# Altium PCB triboard-tc3x7-extension-V01.PcbDoc (part 1 of 2)
Units mm, origin at the board's own origin, x right, y up, seen from the top; angles counter-clockwise.
Board outline 170 x 190 mm, 4 copper layers (Top Layer, Mid Layer 1, Mid Layer 2, Bottom Layer), stack 1.586 mm thick; 25 components, 194 nets, 552 pads, 468 vias.
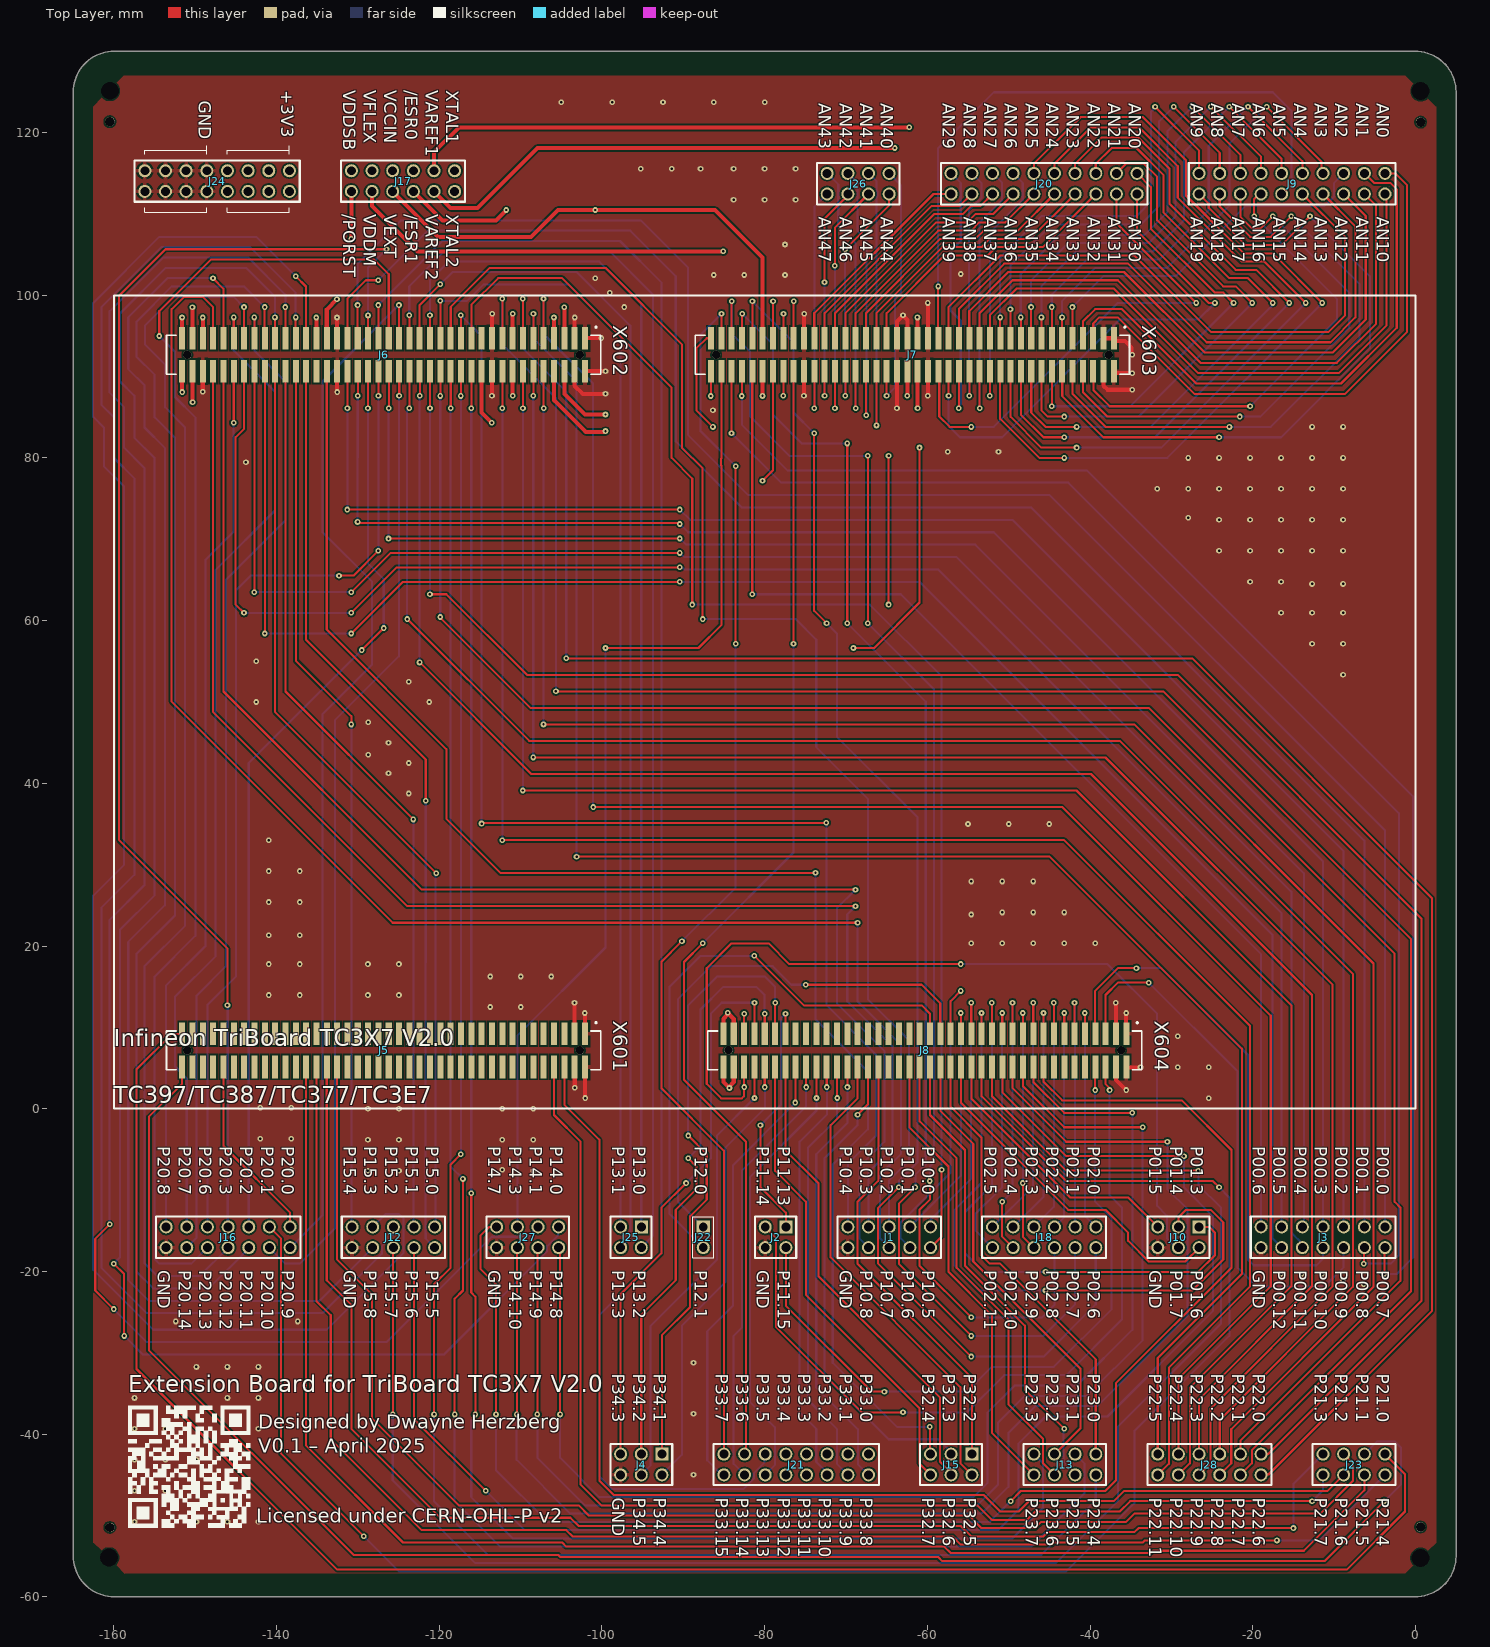
[diagram p0: Top Layer view]
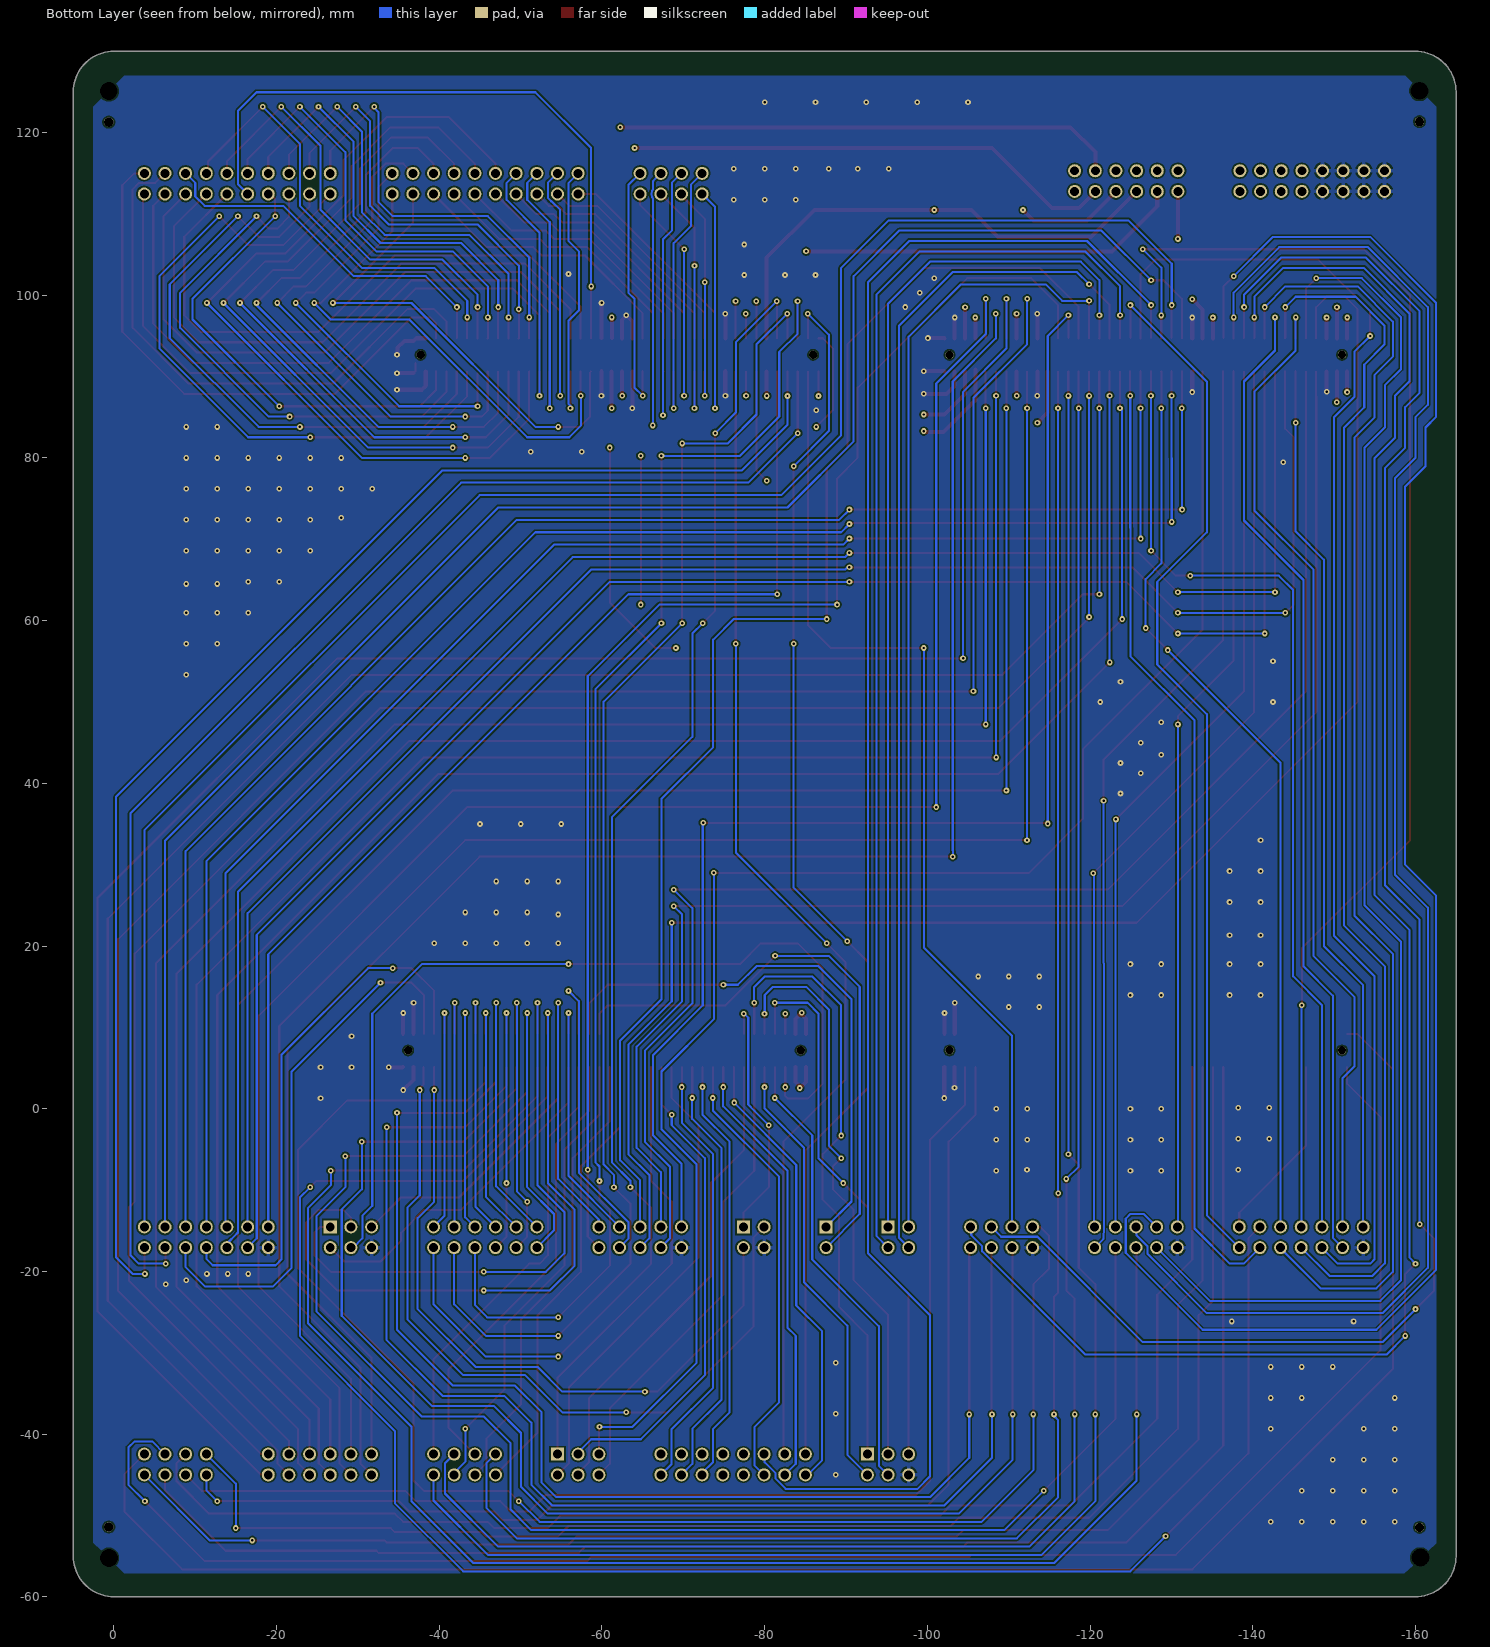
[diagram p1: Bottom Layer view, seen from below]
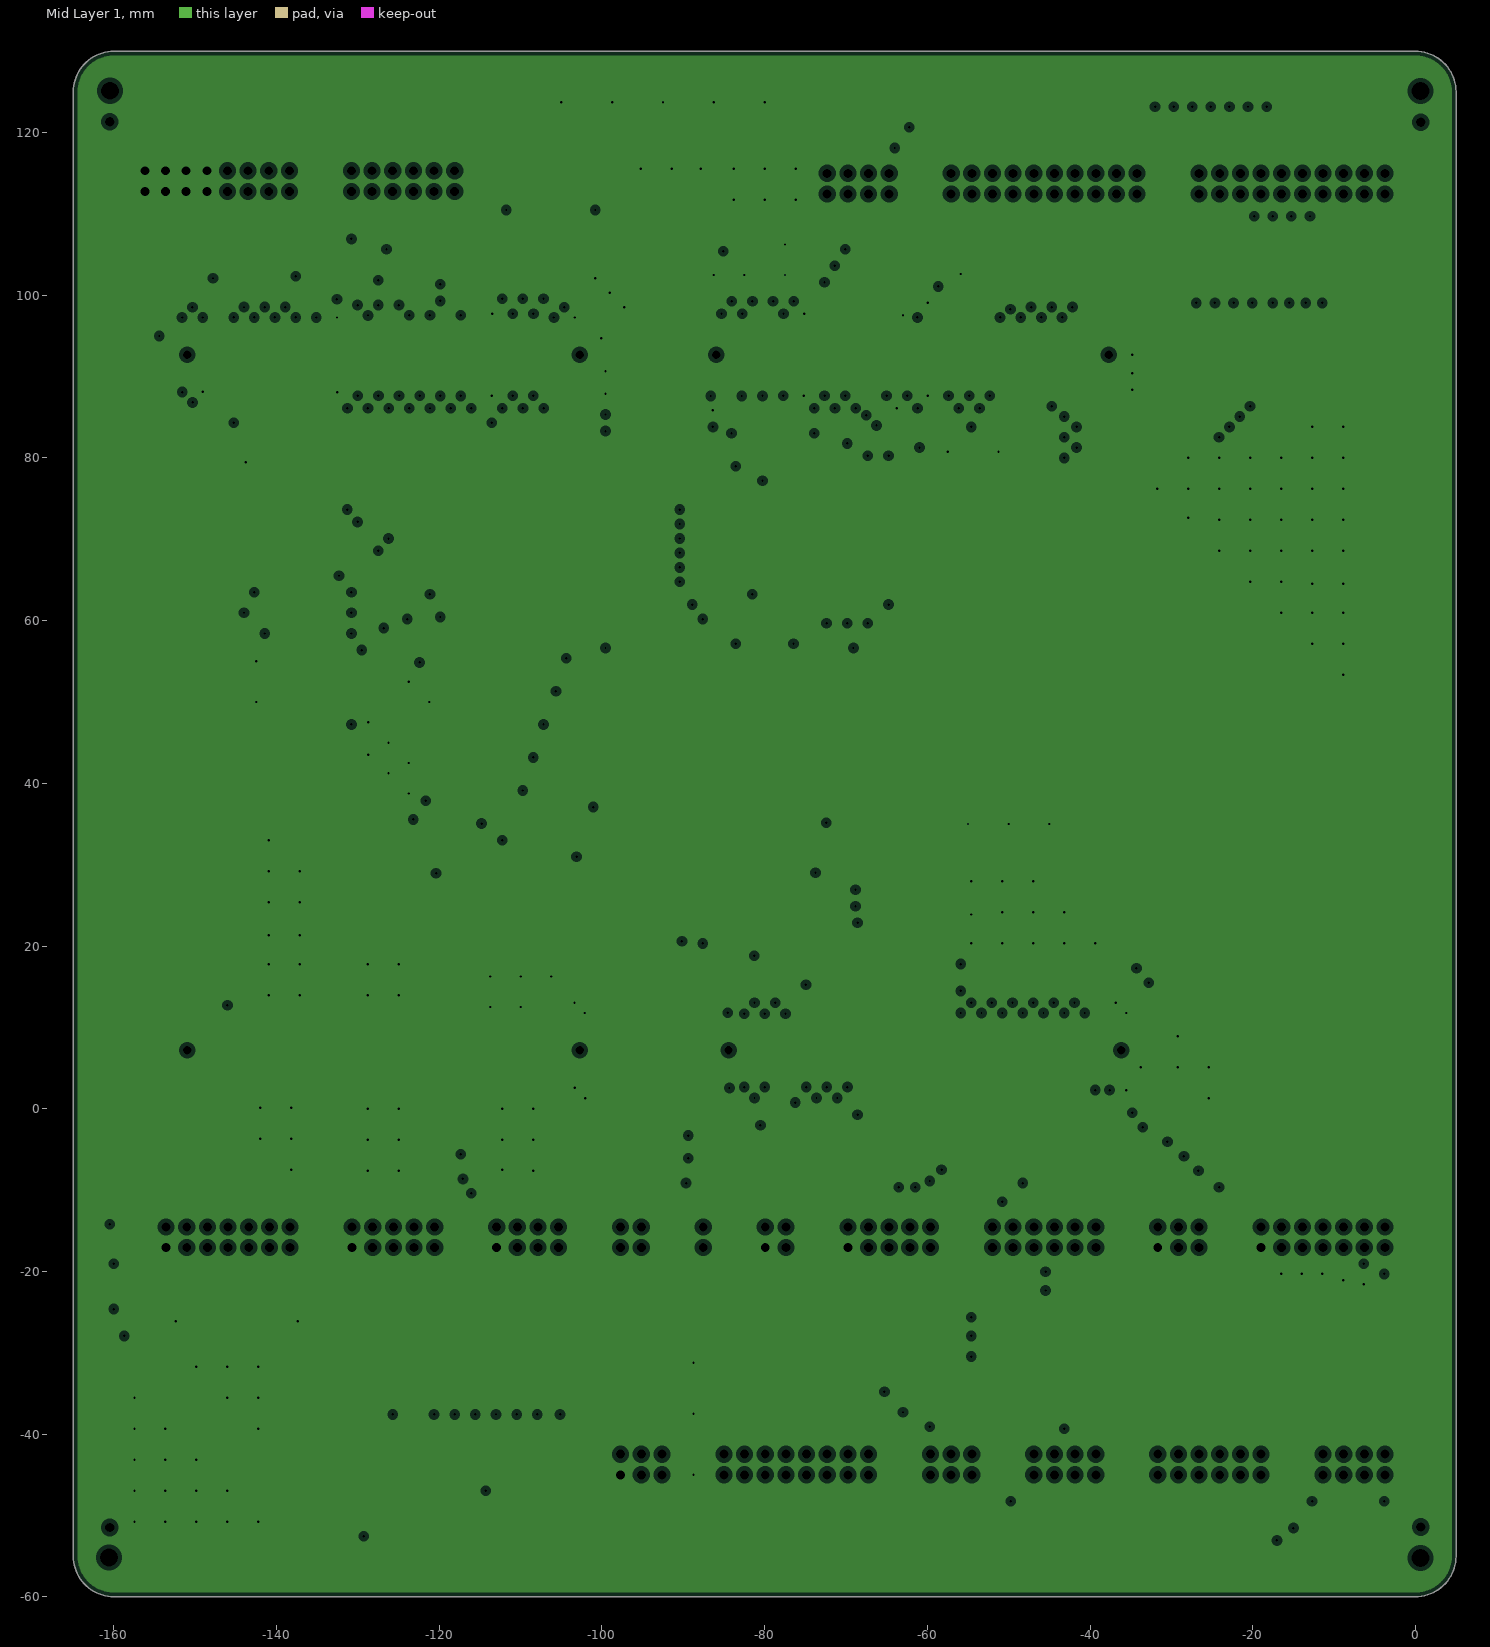
[diagram p2: Mid Layer 1, clearances drawn from the general rule]
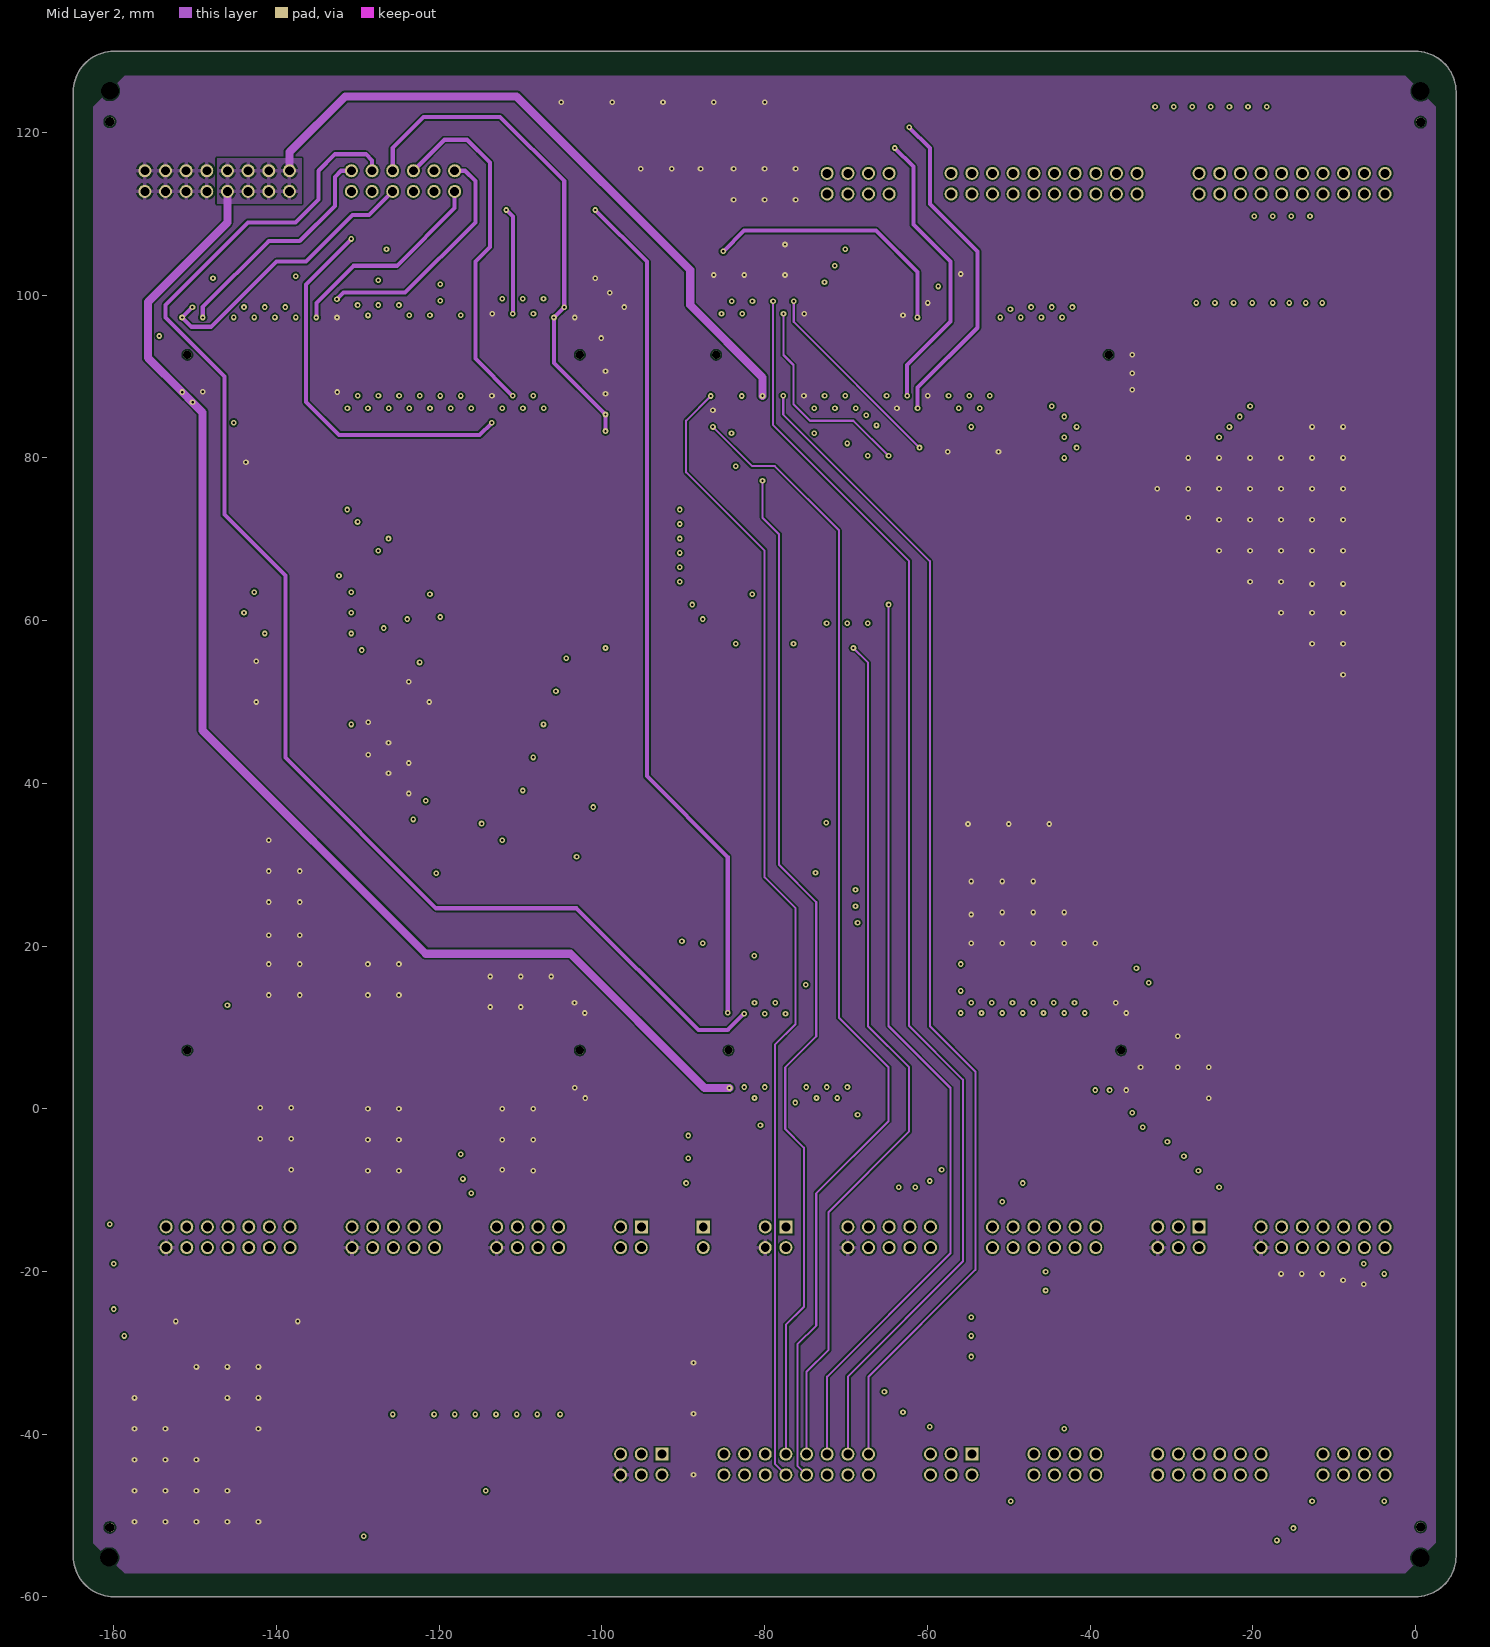
[diagram p3: Mid Layer 2]
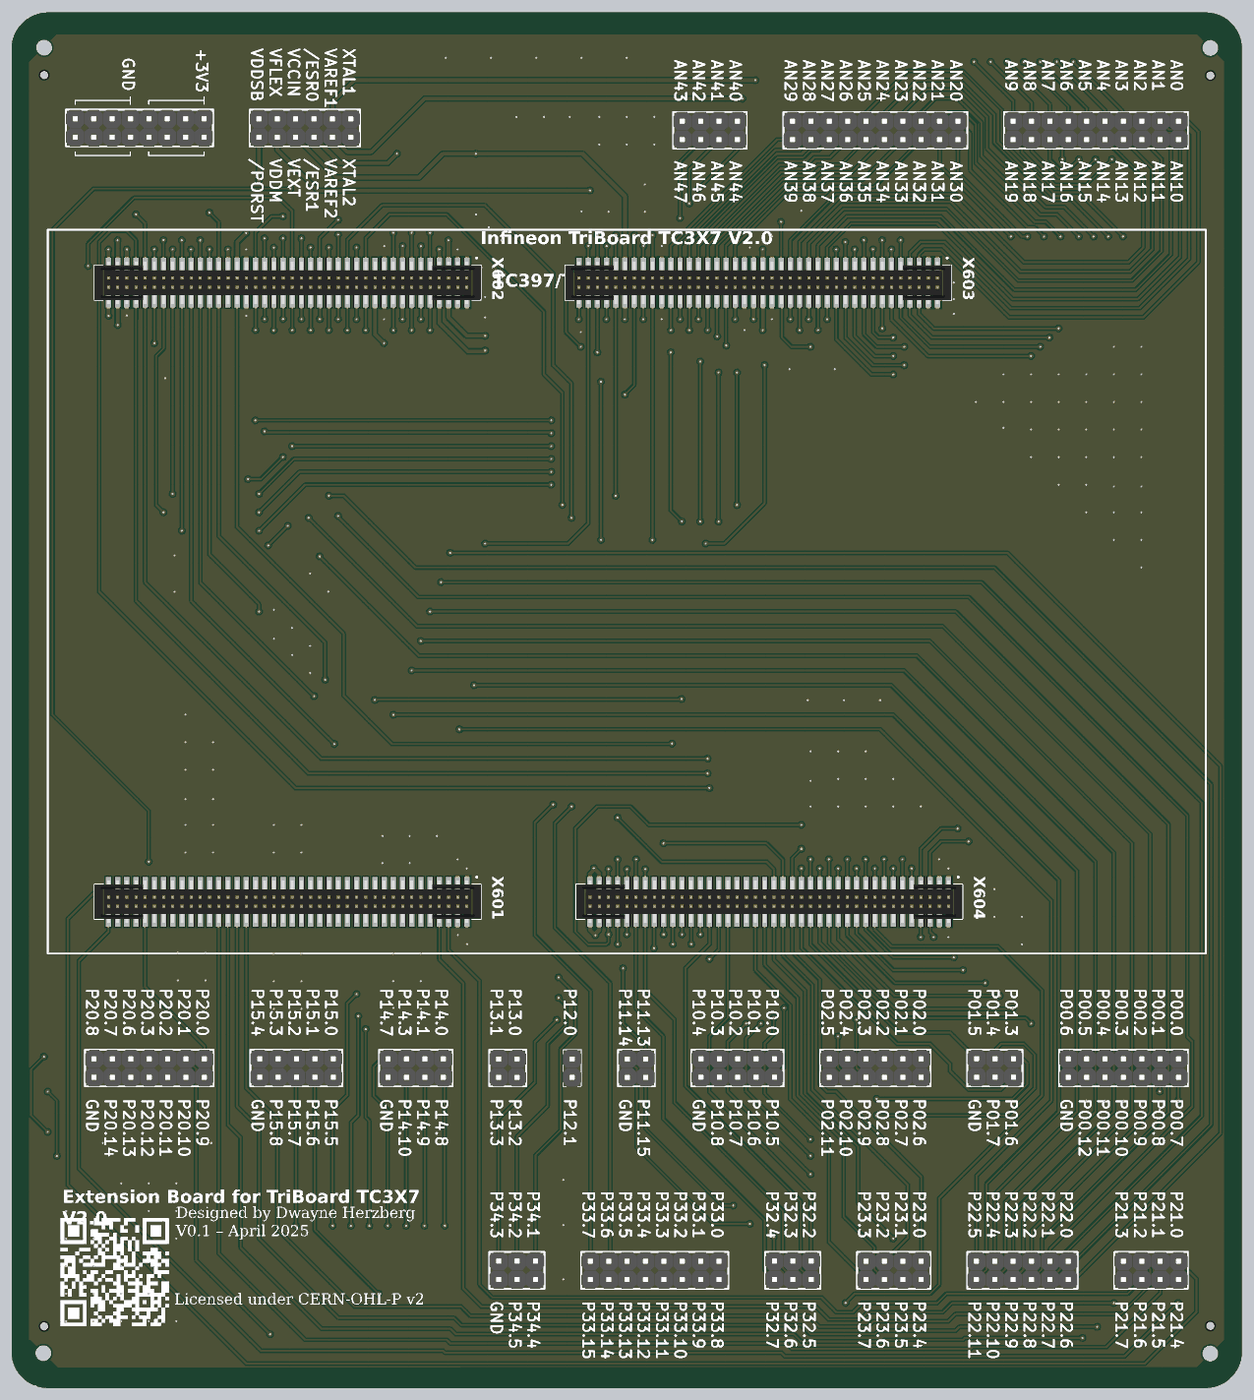
[diagram p5: 3D render of the assembled board from above, using the file's embedded part models]

## Layer stack, top to bottom
Top Solder: solder mask 0.0127, Solder Resist, Dk 3.8
Top Layer: signal copper 0.035
Dielectric 1: prepreg 0.2104, 7628, Dk 4.4
Mid Layer 1: plane copper 0.0152, net GND
Core: core 1.065, FR-4, Dk 4.6
Mid Layer 2: signal copper 0.0152
Dielectric 2: prepreg 0.2104, 7628, Dk 4.4
Bottom Layer: signal copper 0.035
Bottom Solder: solder mask 0.0127, Solder Resist, Dk 3.8

## Board outline
-165,-55 -165,125 cw(c-160,125) -160,130 0,130 cw(c0,125) 5,125 5,-55 cw(c0,-55) 0,-60 -160,-60 cw(c-160,-55)

## Design rules (kind name [scope] priority, off if disabled: settings)
BoardOutlineClearance [All] p1: gap=0.3 ignorepadtopadclearanceinfootprint=FALSE except(0.4: Arc-SplitBarrior Arc-SplitContinuation Track-SplitBarrior Track-SplitContinuation SMDPad-SplitBarrior SMDPad-SplitContinuation THPad-SplitBarrior THPad-SplitContinuation Via-SplitBarrior Via-SplitContinuation Fill-SplitBarrior Fill-SplitContinuation Poly-SplitBarrior Poly-SplitContinuation Region-SplitBarrior Region-SplitContinuation Text-SplitBarrior Text-SplitContinuation)
Clearance "Clearance Different Nets" [All] p1: gap=0.2 ignorepadtopadclearanceinfootprint=FALSE except(0.127: SMDPad-SMDPad SMDPad-Via THPad-Via Via-Via; 0.254: Arc-Via Arc-Text Track-Via Track-Text SMDPad-Text THPad-Text Via-Text Fill-Text Poly-Text Region-Text Text-Text; 0.5: THPad-THPad Via-Hole)
Clearance "Clearance Same Nets" [All] p2: gap=0.2 ignorepadtopadclearanceinfootprint=FALSE except(0.089: Arc-Arc Arc-Track Arc-SMDPad Track-Track Track-SMDPad SMDPad-SMDPad; 0.127: SMDPad-Via THPad-Via; 0.254: Arc-Via Arc-Text Track-Via Track-Text SMDPad-Text THPad-Text Via-Via Via-Text Fill-Text Poly-Text Region-Text Text-Text)
Clearance "Clearance Bottom Layer" [OnLayer('Bottom Layer')] p3: gap=0.203 ignorepadtopadclearanceinfootprint=TRUE except(0.254: Arc-Text Track-Text SMDPad-Text THPad-Text Via-Text Fill-Text Poly-Text Region-Text Text-Text)
Clearance "Clearance Top Layer" [OnLayer('Top Layer')] p4: gap=0.203 ignorepadtopadclearanceinfootprint=TRUE except(0.254: Arc-Text Track-Text SMDPad-Text THPad-Text Via-Text Fill-Text Poly-Text Region-Text Text-Text)
HoleSize [All] p1: absolutevalues=TRUE maxlimit=6.3 minlimit=0.2 maxpercent=80.000 minpercent=20.000
MinimumAnnularRing [All] p1: minimumring=0.13
MinimumSolderMaskSliver [All] p1: minsoldermaskwidth=0.1
PlaneClearance [All] p1: clearance=0.508
PlaneConnect [All] p1: planeconnectstyle=Relief reliefexpansion=0.508 reliefentries=4 reliefconductorwidth=0.254 reliefairgap=0.254
PolygonConnect PolygonConnect_1 [All] p1: thpad.connectstyle=Relief thpad.reliefconductorwidth=0.508 thpad.reliefentries=4 thpad.polygonreliefangle="90 Angle" thpad.airgapwidth=0.254 smdpad.connectstyle=Relief smdpad.reliefconductorwidth=0.508 smdpad.reliefentries=4 smdpad.polygonreliefangle="90 Angle" smdpad.airgapwidth=0.254 via.connectstyle=Direct via.reliefconductorwidth=0.508 via.reliefentries=4 via.polygonreliefangle="90 Angle" via.airgapwidth=0.254
RoutingCorners [All] p1: cornerstyle=Round minsetback=2.54 maxsetback=2.54
RoutingVias [All] p1: holewidth=0.3 width=0.7 viastyle="Through Hole" minholewidth=0.25 minwidth=0.55 maxholewidth=0.4 maxwidth=0.9
SilkToSilkClearance [All] p1: silktosilkclearance=0.1
SilkToSolderMaskClearance [IsPad] p1: minsilkscreentomaskgap=0.1 clearancetoexposedcopper=TRUE
SolderMaskExpansion SolderMask_VIA [IsVia] p1: expansion=0.102 istentingtop=TRUE
SolderMaskExpansion [All] p2: expansion=0.102 istentingtop=FALSE
UnRoutedNet [All] p1: checkbadconnections=TRUE
Width [All] p1: maxlimit=2.54 minlimit=0.089 preferedwidth=0.381
22 further rules are at their usual default settings.

## Components (designator, comment, footprint, x,y, rotation, side; value= is the part's Value field where it differs from the comment)
J1 "Header_5x2" HEADER_5X2 -59.61,-17.079 r180 top locked
J2 "Header_2x2" HEADER_2X2 -77.39,-17.079 r180 top locked
J3 "Header_7x2" HEADER_7X2 -3.73,-17.079 r180 top locked
J4 "Header_3x2" Header_3x2 -92.63,-45.019 r180 top locked
J5 "FTSH-140-02-L-DV-ES-A" SAMTEC_FTSH-140-XX-XXX-DV-ES-A -126.853,7.166 r180 top locked
J6 "FTSH-140-02-L-DV-ES-A" SAMTEC_FTSH-140-XX-XXX-DV-ES-A -126.853,92.688 r180 top locked
J7 "FTSH-140-02-L-DV-ES-A" SAMTEC_FTSH-140-XX-XXX-DV-ES-A -61.829,92.688 r180 top locked
J8 "FTSH-140-02-L-DV-ES-A" SAMTEC_FTSH-140-XX-XXX-DV-ES-A -60.305,7.166 r180 top locked
J9 "Header_10x2" HEADER_10X2 -3.73,112.461 r180 top locked
J10 "Header_3x2" HEADER_3X2 -26.59,-17.079 r180 top locked
J12 "Header_5x2" HEADER_5X2 -120.57,-17.079 r180 top locked
J13 "Header_4x2" HEADER_4X2 -39.29,-45.019 r180 top locked
J15 "Header_3x2" HEADER_3X2 -54.53,-45.019 r180 top locked
J16 "Header_7x2" HEADER_7X2 -138.35,-17.079 r180 top locked
J17 "Header_6x2" HEADER_6X2 -118.11,112.776 r180 top locked
J18 "Header_6x2" HEADER_6X2 -39.29,-17.079 r180 top locked
J20 "Header_10x2" HEADER_10X2 -34.21,112.461 r180 top locked
J21 "Header_8x2" HEADER_8X2 -67.23,-45.019 r180 top locked
J22 "Header_2" HEADER_2 -87.55,-14.539 r270 top locked
J23 "Header_4x2" HEADER_4X2 -3.73,-45.019 r180 top locked
J24 "Header_8x2" HEADER_8X2 -156.21,115.316 r0 top locked
J25 "Header_2x2" HEADER_2X2 -95.17,-17.079 r180 top locked
J26 "Header_4x2" HEADER_4X2 -64.69,112.461 r180 top locked
J27 "Header_4x2" HEADER_4X2 -105.33,-17.079 r180 top locked
J28 "Header_6x2" HEADER_6X2 -18.97,-45.019 r180 top locked

## Footprints (in the part's own frame and the unit in brackets; to place one, negate y for a bottom-side part, rotate by r counter-clockwise, add the part's x,y. Pads: shape width x height; smd on the part's side, far side on the other; paste and mask are expansions set on the pad)
HEADER_2 [mm]
  rect 1.6x1.6 hole 1.1: 1(0,0)
  round 1.6 hole 1.1: 2(2.54,0)
  silkscreen extent -1.27,-1.27 3.81,1.27, body extent -1.25,-1.29 3.83,1.25, height 13.04
HEADER_2X2 [mm]
  rect 1.6x1.6 hole 1.1: 1(0,-2.54)
  round 1.6 hole 1.1: 2(0,0) 3(2.54,-2.54) 4(2.54,0)
  silkscreen extent -1.27,-3.81 3.81,1.27, body extent -1.27,-3.81 3.81,1.27, height 13.04
Header_3x2 [mm]
  rect 1.6x1.6 hole 1.1: 1(0,-2.54)
  round 1.6 hole 1.1: 2(0,0) 3(2.54,-2.54) 4(2.54,0) 5(5.08,-2.54) 6(5.08,0)
  silkscreen extent -1.27,-3.81 6.35,1.27, body extent -1.27,-3.81 6.35,1.27, height 13.04
HEADER_3X2 [mm]
  rect 1.6x1.6 hole 1.1: 1(0,-2.54)
  round 1.6 hole 1.1: 2(0,0) 3(2.54,-2.54) 4(2.54,0) 5(5.08,-2.54) 6(5.08,0)
  silkscreen extent -1.27,-3.81 6.35,1.27, body extent -1.27,-3.81 6.35,1.27, height 13.04
HEADER_4X2 [mm]
  round 1.6 hole 1.1: 1(0,-2.54) 2(0,0) 3(2.54,-2.54) 4(2.54,0) 5(5.08,-2.54) 6(5.08,0) 7(7.62,-2.54) 8(7.62,0)
  silkscreen extent -1.27,-3.81 8.89,1.27, body extent -1.27,-3.81 8.89,1.27, height 13.04
HEADER_5X2 [mm]
  round 1.6 hole 1.1: 1(0,-2.54) 2(0,0) 3(2.54,-2.54) 4(2.54,0) 5(5.08,-2.54) 6(5.08,0) 7(7.62,-2.54) 8(7.62,0) 9(10.16,-2.54) 10(10.16,0)
  silkscreen extent -1.27,-3.81 11.43,1.27, body extent -1.27,-3.81 11.43,1.27, height 13.04
HEADER_6X2 [mm]
  round 1.6 hole 1.1: 1(0,-2.54) 2(0,0) 3(2.54,-2.54) 4(2.54,0) 5(5.08,-2.54) 6(5.08,0) 7(7.62,-2.54) 8(7.62,0) 9(10.16,-2.54) 10(10.16,0) 11(12.7,-2.54) 12(12.7,0)
  silkscreen extent -1.27,-3.81 13.97,1.27, body extent -1.27,-3.81 13.97,1.27, height 13.04
HEADER_7X2 [mm]
  round 1.6 hole 1.1: 1(0,-2.54) 2(0,0) 3(2.54,-2.54) 4(2.54,0) 5(5.08,-2.54) 6(5.08,0) 7(7.62,-2.54) 8(7.62,0) 9(10.16,-2.54) 10(10.16,0) 11(12.7,-2.54) 12(12.7,0) 13(15.24,-2.54) 14(15.24,0)
  silkscreen extent -1.27,-3.81 16.51,1.27, body extent -1.27,-3.81 16.51,1.27, height 13.04
HEADER_8X2 [mm]
  round 1.6 hole 1.1: 1(0,-2.54) 2(0,0) 3(2.54,-2.54) 4(2.54,0) 5(5.08,-2.54) 6(5.08,0) 7(7.62,-2.54) 8(7.62,0) 9(10.16,-2.54) 10(10.16,0) 11(12.7,-2.54) 12(12.7,0) 13(15.24,-2.54) 14(15.24,0) 15(17.78,-2.54) 16(17.78,0)
  silkscreen extent -1.27,-3.81 19.05,1.27, body extent -1.27,-3.81 19.05,1.27, height 13.04
HEADER_10X2 [mm]
  round 1.6 hole 1.1: 1(0,-2.54) 2(0,0) 3(2.54,-2.54) 4(2.54,0) 5(5.08,-2.54) 6(5.08,0) 7(7.62,-2.54) 8(7.62,0) 9(10.16,-2.54) 10(10.16,0) 11(12.7,-2.54) 12(12.7,0) 13(15.24,-2.54) 14(15.24,0) 15(17.78,-2.54) 16(17.78,0) 17(20.32,-2.54) 18(20.32,0) 19(22.86,-2.54) 20(22.86,0)
  silkscreen extent -1.27,-3.81 24.13,1.27, body extent -1.27,-3.81 24.13,1.27, height 13.04
SAMTEC_FTSH-140-XX-XXX-DV-ES-A [mm]
  rect 0.74x2.79 smd: 01(-24.765,-2.035) 02(-24.765,2.035) 03(-23.495,-2.035) 04(-23.495,2.035) 05(-22.225,-2.035) 06(-22.225,2.035) 07(-20.955,-2.035) 08(-20.955,2.035) 09(-19.685,-2.035) 10(-19.685,2.035) 11(-18.415,-2.035) 12(-18.415,2.035) 13(-17.145,-2.035) 14(-17.145,2.035) 15(-15.875,-2.035) 16(-15.875,2.035) 17(-14.605,-2.035) 18(-14.605,2.035) 19(-13.335,-2.035) 20(-13.335,2.035) 21(-12.065,-2.035) 22(-12.065,2.035) 23(-10.795,-2.035) 24(-10.795,2.035) 25(-9.525,-2.035) 26(-9.525,2.035) 27(-8.255,-2.035) 28(-8.255,2.035) 29(-6.985,-2.035) 30(-6.985,2.035) 31(-5.715,-2.035) 32(-5.715,2.035) 33(-4.445,-2.035) 34(-4.445,2.035) 35(-3.175,-2.035) 36(-3.175,2.035) 37(-1.905,-2.035) 38(-1.905,2.035) 39(-0.635,-2.035) 40(-0.635,2.035) 41(0.635,-2.035) 42(0.635,2.035) 43(1.905,-2.035) 44(1.905,2.035) 45(3.175,-2.035) 46(3.175,2.035) 47(4.445,-2.035) 48(4.445,2.035) 49(5.715,-2.035) 50(5.715,2.035) 51(6.985,-2.035) 52(6.985,2.035) 53(8.255,-2.035) 54(8.255,2.035) 55(9.525,-2.035) 56(9.525,2.035) 57(10.795,-2.035) 58(10.795,2.035) 59(12.065,-2.035) 60(12.065,2.035) 61(13.335,-2.035) 62(13.335,2.035) 63(14.605,-2.035) 64(14.605,2.035) 65(15.875,-2.035) 66(15.875,2.035) 67(17.145,-2.035) 68(17.145,2.035) 69(18.415,-2.035) 70(18.415,2.035) 71(19.685,-2.035) 72(19.685,2.035) 73(20.955,-2.035) 74(20.955,2.035) 75(22.225,-2.035) 76(22.225,2.035) 77(23.495,-2.035) 78(23.495,2.035) 79(24.765,-2.035) 80(24.765,2.035)
  round 1.02 hole 1.02 unplated: ""(-24.13,0) ""(24.13,0)
  silkscreen extent -26.68,-3.5 26.68,2.39, body extent -26.68,-2.92 26.68,2.92, height 4.94

## Part data
J5 J6 J7 J8: "Board Connector", Manufacturer=Samtec, Supplier Part Number=SAM9464-ND, Category="Headers and Wire Housings", ComponentLink1Description=https://datasheet.ciiva.com:443/pdfs/VipMasterIC/IC/SAMI/SAMI-S-A0005694125/SAMI-S-A0005694125-1.pdf?src-supplier=IHS+Markit, ComponentLink1URL=https://datasheet.ciiva.com:443/pdfs/VipMasterIC/IC/SAMI/SAMI-S-A0005694125/SAMI-S-A0005694125-1.pdf?src-supplier=IHS+Markit, ComponentLink2Description=https://datasheet.ciiva.com/9623/ftsh-mt-9623839.pdf?src-supplier=Avnet, ComponentLink2URL=https://datasheet.ciiva.com/9623/ftsh-mt-9623839.pdf?src-supplier=Avnet, Connector Type="BOARD CONNECTOR", Contact Finish - Mating="GOLD (10)", Contact Finish - Termination="MATTE TIN", Contact Material=Bronze, JESD-609 Code=e3, Manufacturer Part Number=FTSH-140-02-L-DV-ES-A, Pricing="1=9,65, 10=9,348, 25=9,0468, 50=8,4226, 100=7,1666 (USD)", Reach SVHC Compliant=No, RoHS=Yes, RoHS Compliant=Yes, Stock=78, Supplier=Digikey

## Free pads (board coordinates)
  round 0 hole 2.2 unplated paste-2539.97 mask-2539.97: MH(-160.609,-55.193) MH(-160.506,125.147) MH(0.635,-55.245) MH(0.644,125.104)
  round 1.152 hole 1.152 unplated paste-2539.97 mask+0.148: TH(-160.506,-51.487) TH(-160.506,121.355) TH(0.644,-51.426) TH(0.644,121.294)

## Via types
v1: diameter 0.7, hole 0.3, Top Layer to Bottom Layer, tented both sides, 468 vias

## Nets (pads, with @x,y where several pads share a name; then routed paths per layer and width w, separated by ;. In a path a pad name is that pad's centre, name@x,y a point inside that pad or via, vN(x,y) a via of type N, cw(c..) or ccw(c..) an arc to the next point about the centre after c; other vN are vias at no path point)
+3V3: J6.78 J6.80 J7.70 J8.78 J8.80 J24.9 J24.10 J24.11 J24.12 J24.13 J24.14 J24.15 J24.16 | length 253.6
  Top Layer w0.5: v1@-151.618,88.115 J6.80@-151.618,90.653 ; v1@-150.348,86.845 J6.78@-150.348,90.653 ; J8.80@-85.07,5.131 -85.07,3.282 v1(-84.328,2.54) -84.328,2.748 -83.8,3.276 J8.78@-83.8,5.131 ; v1@-80.244,87.65 J7.70@-80.244,90.653
  Mid Layer 2 w1: J24.9@-146.05,112.776 -146.05,108.966 -155.821,99.195 -155.821,92.318 v1(-151.608,88.105) v1(-150.338,86.835) -149.098,85.595 -149.098,46.482 -121.666,19.05 -103.886,19.05 -87.376,2.54 v1(-84.328,2.54) ; J24.16@-138.43,115.316 -138.43,117.602 -131.572,124.46 -110.49,124.46 -89.154,103.124 -89.154,98.806 -80.264,89.916 v1(-80.264,87.63)
/ESR0: J6.16 J17.5 | length 46.5
  Top Layer w0.5: v1@-110.978,87.65 J6.16@-110.978,90.653
  Mid Layer 2 w0.5: J17.5@-123.19,115.316 -119.38,119.126 -116.586,119.126 -113.792,116.332 -113.792,105.918 -115.57,104.14 -115.57,92.222 v1(-110.988,87.64)
/ESR1: J6.15 J17.6 | length 29.5
  Top Layer w0.5: J17.6@-123.19,112.776 -119.634,109.22 -113.03,109.22 v1(-111.76,110.49) ; J6.15@-110.978,94.723 v1@-110.978,97.726
  Mid Layer 2 w0.5: v1(-111.76,110.49) -110.968,109.698 v1(-110.968,97.736)
/PORST: J6.22 J17.12 | length 60.2
  Top Layer w0.5: v1(-130.81,106.934) J17.12@-130.81,112.776 ; J6.22@-114.788,90.653 -114.788,85.578 v1(-113.538,84.328)
  Mid Layer 2 w0.5: v1(-130.81,106.934) -136.398,101.346 -136.398,86.868 -132.334,82.804 -115.062,82.804 v1(-113.538,84.328)
AN0: J7.05 J9.1 | length 69.1
  Top Layer w0.254: J7.05@-39.604,94.723 -39.604,96.54 -38.862,97.282 -36.576,97.282 -27.178,87.884 -8.636,87.884 -1.016,95.504 -1.016,113.538 -2.479,115.001 J9.1@-3.73,115.001
AN1: J7.07 J9.3 | length 69.7
  Top Layer w0.254: J7.07@-40.864,94.733 -40.864,96.804 -39.37,98.298 -36.068,98.298 -26.924,89.154 -9.144,89.154 -2.286,96.012 -2.286,113.03 -3.076,113.82 -5.089,113.82 J9.3@-6.27,115.001
AN2: J7.09 J9.5 | length 45
  Top Layer w0.254: v1(-42.164,98.552) -42.154,98.542 -42.154,94.753 J7.09@-42.134,94.733
  Bottom Layer w0.254: v1(-42.164,98.552) -38.354,102.362 -29.464,102.362 -20.828,110.998 -11.143,110.998 -9.991,112.15 -9.991,113.82 J9.5@-8.81,115.001
AN3: J7.11 J9.7 | length 55.2
  Top Layer w0.254: v1(-43.434,97.282) -43.424,97.272 -43.424,94.733 J7.11@-43.414,94.723 ; v1(-18.288,123.19) -11.555,116.457 -11.555,115.206 J9.7@-11.35,115.001
  Bottom Layer w0.254: v1(-43.434,97.282) -43.434,99.314 -39.37,103.378 -30.48,103.378 -22.86,110.998 -22.86,118.618 v1(-18.288,123.19)
AN4: J7.13 J9.9 | length 54.6
  Top Layer w0.254: v1(-44.704,98.552) -44.694,98.542 -44.694,94.733 J7.13@-44.684,94.723 ; v1(-20.574,123.19) -13.89,116.506 J9.9@-13.89,115.001
  Bottom Layer w0.254: v1(-44.704,98.552) -44.704,100.076 -40.386,104.394 -31.496,104.394 -25.4,110.49 -25.4,118.364 v1(-20.574,123.19)
AN5: J7.15 J9.11 | length 54.4
  Top Layer w0.254: v1(-45.974,97.282) -45.964,97.272 -45.964,94.733 J7.15@-45.954,94.723 ; v1(-22.86,123.19) -16.43,116.76 J9.11@-16.43,115.001
  Bottom Layer w0.254: v1(-45.974,97.282) -45.974,101.092 -41.656,105.41 -32.258,105.41 -28.448,109.22 -28.448,117.602 v1(-22.86,123.19)
AN6: J7.17 J9.13 | length 54.2
  Top Layer w0.254: v1(-47.244,98.552) -47.234,98.542 -47.234,94.733 J7.17@-47.224,94.723 ; v1(-25.146,123.19) -18.97,117.014 -18.97,115.081 J9.13@-18.93,115.041
  Bottom Layer w0.254: v1(-47.244,98.552) -47.244,101.854 -42.672,106.426 -32.766,106.426 -29.464,109.728 -29.464,118.872 v1(-25.146,123.19)
AN7: J7.19 J9.15 | length 53.9
  Top Layer w0.254: v1(-48.514,97.282) -48.504,97.272 J7.19@-48.504,94.713 ; v1(-27.432,123.19) -21.51,117.268 -21.51,115.081 J9.15@-21.47,115.041
  Bottom Layer w0.254: v1(-48.514,97.282) -48.514,102.616 -43.688,107.442 -33.274,107.442 -30.48,110.236 -30.48,120.142 v1(-27.432,123.19)
AN8: J7.21 J9.17 | length 53.7
  Top Layer w0.254: v1(-49.784,98.298) -49.774,98.288 -49.774,94.733 J7.21@-49.764,94.723 ; v1(-29.718,123.19) -24.05,117.522 -24.05,115.081 J9.17@-24.01,115.041
  Bottom Layer w0.254: v1(-49.784,98.298) -49.784,103.632 -44.704,108.712 -33.782,108.712 -31.496,110.998 -31.496,121.412 v1(-29.718,123.19)
AN9: J7.23 J9.19 | length 53.6
  Top Layer w0.254: v1(-51.054,97.282) -51.044,97.272 -51.044,94.733 J7.23@-51.034,94.723 ; v1(-32.004,123.19) -26.59,117.776 -26.59,115.081 J9.19@-26.55,115.041
  Bottom Layer w0.254: v1(-51.054,97.282) -51.054,104.648 -45.974,109.728 -34.29,109.728 -32.512,111.506 -32.512,122.533 -32.004,123.041 v1(-32.004,123.19)
AN10: J7.25 J9.2 | length 75.9
  Top Layer w0.254: J7.25@-52.304,94.723 -52.304,97.556 -49.022,100.838 -37.084,100.838 -26.67,90.424 -9.398,90.424 -3.556,96.266 -3.556,112.287 J9.2@-3.73,112.461
AN11: J7.27 J9.4 | length 76.3
  Top Layer w0.254: J7.27@-53.584,94.713 -53.584,97.8 -49.53,101.854 -36.576,101.854 -26.416,91.694 -9.652,91.694 -4.826,96.52 -4.826,111.017 J9.4@-6.27,112.461
AN12: J7.29 J9.6 | length 76.4
  Top Layer w0.254: J7.29@-54.844,94.723 -54.844,98.064 -50.038,102.87 -35.814,102.87 -25.908,92.964 -10.16,92.964 -6.096,97.028 -6.096,109.747 J9.6@-8.81,112.461
AN13: J7.31 J9.8 | length 76.7
  Top Layer w0.254: J7.31@-56.114,94.723 -56.114,98.318 -50.546,103.886 -35.306,103.886 -25.654,94.234 -10.414,94.234 -7.366,97.282 -7.366,108.477 J9.8@-11.35,112.461
AN14: J7.33 J9.10 | length 77.1
  Top Layer w0.254: J7.33@-57.384,94.723 -57.384,98.572 -51.054,104.902 -34.544,104.902 -25.146,95.504 -10.668,95.504 -8.636,97.536 -8.636,107.207 J9.10@-13.89,112.461
AN15: J7.35 J9.12 | length 81.3
  Top Layer w0.254: v1(-58.674,101.092) -58.664,101.082 J7.35@-58.664,94.713
  Bottom Layer w0.254: v1(-58.674,101.092) -58.674,118.11 -51.816,124.968 -17.526,124.968 -15.249,122.691 -15.249,113.642 J9.12@-16.43,112.461
AN16: J7.06 J9.14 | length 57.6
  Top Layer w0.254: J7.06@-39.594,90.663 -39.594,88.362 -37.592,86.36 v1(-20.32,86.36) ; v1(-19.812,109.728) -19.812,111.843 -19.194,112.461 J9.14@-18.97,112.461
  Bottom Layer w0.254: v1(-20.32,86.36) -9.652,97.028 -9.652,99.568 v1(-19.812,109.728)
AN17: J7.08 J9.16 | length 66.7
  Top Layer w0.254: J7.08@-40.874,90.653 -40.874,88.118 -37.846,85.09 v1(-21.59,85.09) ; J9.16@-21.51,112.461 -21.51,109.648 -20.066,108.204 -19.05,108.204 v1(-17.526,109.728)
  Bottom Layer w0.254: v1(-21.59,85.09) -19.05,85.09 -8.128,96.012 -8.128,100.309 -17.526,109.707 v1(-17.526,109.728)
AN18: J7.10 J9.18 | length 75.7
  Top Layer w0.254: J7.10@-42.144,90.653 -42.144,87.864 -38.1,83.82 v1(-22.86,83.82) ; J9.18@-24.05,112.461 -24.05,110.918 -20.32,107.188 -17.78,107.188 v1(-15.24,109.728)
  Bottom Layer w0.254: v1(-22.86,83.82) -17.78,83.82 -6.858,94.742 -6.858,101.346 v1(-15.24,109.728)
AN19: J7.12 J9.20 | length 84.8
  Top Layer w0.254: J7.12@-43.414,90.653 -43.414,87.61 -38.354,82.55 v1(-24.13,82.55) ; J9.20@-26.59,112.461 -25.4,111.271 -25.4,110.744 -20.828,106.172 -16.51,106.172 v1(-12.954,109.728)
  Bottom Layer w0.254: v1(-24.13,82.55) -16.51,82.55 -5.588,93.472 -5.588,102.362 v1(-12.954,109.728)
AN20: J7.14 J20.1 | length 53.1
  Top Layer w0.254: v1(-44.704,86.36) -44.694,86.37 J7.14@-44.694,90.409 ; J20.1@-34.21,115.001 -32.512,113.303 -32.512,108.204 -24.638,100.33 -23.622,100.33 v1(-22.352,99.06)
  Bottom Layer w0.254: v1(-44.704,86.36) -35.052,86.36 v1(-22.352,99.06)
AN21: J7.16 J20.3 | length 64.2
  Top Layer w0.254: J7.16@-45.954,90.653 -45.954,85.832 -45.212,85.09 v1(-43.18,85.09) ; J20.3@-36.75,115.001 -35.569,116.182 -33.378,116.182 -31.75,114.554 -31.75,109.22 -23.622,101.092 -22.098,101.092 v1(-20.066,99.06)
  Bottom Layer w0.254: v1(-43.18,85.09) -34.036,85.09 v1(-20.066,99.06)
AN22: J7.18 J20.5 | length 76.3
  Top Layer w0.254: J7.18@-47.224,90.653 -47.224,85.578 -45.466,83.82 v1(-41.656,83.82) ; J20.5@-39.29,115.001 -39.29,116.158 -37.338,118.11 -34.29,118.11 -30.988,114.808 -30.988,110.236 -22.86,102.108 -20.574,102.108 v1(-17.526,99.06)
  Bottom Layer w0.254: v1(-41.656,83.82) -32.512,83.82 -17.526,98.806 v1(-17.526,99.06)
AN23: J7.20 J20.7 | length 86.1
  Top Layer w0.254: J7.20@-48.494,90.653 -48.494,85.324 -45.72,82.55 v1(-43.18,82.55) ; J20.7@-41.83,115.001 -41.83,116.158 -38.608,119.38 -34.036,119.38 -30.226,115.57 -30.226,111.252 -22.098,103.124 -19.558,103.124 v1(-15.494,99.06)
  Bottom Layer w0.254: v1(-43.18,82.55) -32.004,82.55 v1(-15.494,99.06)
AN24: J7.22 J20.9 | length 95.9
  Top Layer w0.254: J7.22@-49.764,90.643 -49.764,85.07 -45.974,81.28 v1(-41.656,81.28) ; J20.9@-44.37,115.001 -44.37,116.158 -39.878,120.65 -33.974,120.65 -29.21,115.886 -29.21,112.014 -21.336,104.14 -18.542,104.14 v1(-13.462,99.06)
  Bottom Layer w0.254: v1(-41.656,81.28) -31.242,81.28 v1(-13.462,99.06)
AN25: J7.24 J20.11 | length 106.4
  Top Layer w0.254: J7.24@-51.034,90.653 -51.044,90.643 -51.044,84.826 -46.228,80.01 v1(-43.18,80.01) ; J20.11@-46.91,115.001 -46.91,116.158 -41.148,121.92 -33.528,121.92 -28.194,116.586 -28.194,112.268 -21.082,105.156 -17.526,105.156 v1(-11.43,99.06)
  Bottom Layer w0.254: v1(-43.18,80.01) -30.48,80.01 v1(-11.43,99.06)
AN26: J7.26 J20.13 | length 32.5
  Top Layer w0.254: v1(-52.314,87.64) -52.304,87.65 J7.26@-52.304,90.653
  Bottom Layer w0.254: v1(-52.314,87.64) -52.314,107.706 -48.269,111.751 -48.269,113.82 J20.13@-49.45,115.001
AN27: J7.28 J20.15 | length 35
  Top Layer w0.254: v1(-53.574,86.126) J7.28@-53.574,90.653
  Bottom Layer w0.254: v1(-53.574,86.126) -53.574,108.986 -50.809,111.751 -50.809,113.82 J20.15@-51.99,115.001
AN28: J7.30 J20.17 | length 50
  Top Layer w0.254: v1(-54.854,87.64) -54.834,87.66 J7.30@-54.834,90.663
  Bottom Layer w0.254: v1(-54.854,87.64) -54.854,110.5 -53.876,111.478 ; J20.17@-54.53,115.001 -53.349,113.82 -53.349,112.005 -53.655,111.668 ; -53.876,111.478 ccw(c-54.53,112.461) -53.655,111.668 ; -53.876,111.478 ccw(c-54.53,112.461) -53.655,111.668 ; -53.876,111.478 ccw(c-54.53,112.461) -53.655,111.668 ; -53.876,111.478 ccw(c-54.53,112.461) -53.655,111.668 ; -53.876,111.478 ccw(c-54.53,112.461) -53.655,111.668 ; -53.876,111.478 ccw(c-54.53,112.461) -53.655,111.668 ; -53.876,111.478 ccw(c-54.53,112.461) -53.655,111.668 ; -53.876,111.478 ccw(c-54.53,112.461) -53.655,111.668 ; -53.876,111.478 ccw(c-54.53,112.461) -53.655,111.668 ; -53.876,111.478 ccw(c-54.53,112.461) -53.655,111.668 ; -53.876,111.478 ccw(c-54.53,112.461) -53.655,111.668 ; -53.876,111.478 ccw(c-54.53,112.461) -53.655,111.668 ; -53.876,111.478 ccw(c-54.53,112.461) -53.655,111.668 ; -53.876,111.478 ccw(c-54.53,112.461) -53.655,111.668 ; -53.876,111.478 ccw(c-54.53,112.461) -53.655,111.668 ; -53.876,111.478 ccw(c-54.53,112.461) -53.655,111.668 ; -53.876,111.478 ccw(c-54.53,112.461) -53.655,111.668 ; -53.876,111.478 ccw(c-54.53,112.461) -53.655,111.668 ; -53.876,111.478 ccw(c-54.53,112.461) -53.655,111.668 ; -53.876,111.478 ccw(c-54.53,112.461) -53.655,111.668 ; -53.876,111.478 ccw(c-54.53,112.461) -53.655,111.668 ; -53.876,111.478 ccw(c-54.53,112.461) -53.655,111.668 ; -53.876,111.478 ccw(c-54.53,112.461) -53.655,111.668 ; -53.876,111.478 ccw(c-54.53,112.461) -53.655,111.668 ; -53.876,111.478 ccw(c-54.53,112.461) -53.655,111.668 ; -53.876,111.478 ccw(c-54.53,112.461) -53.655,111.668 ; -53.876,111.478 ccw(c-54.53,112.461) -53.655,111.668 ; -53.876,111.478 ccw(c-54.53,112.461) -53.655,111.668 ; -53.876,111.478 ccw(c-54.53,112.461) -53.655,111.668 ; -53.876,111.478 ccw(c-54.53,112.461) -53.655,111.668 ; -53.876,111.478 ccw(c-54.53,112.461) -53.655,111.668 ; -53.876,111.478 ccw(c-54.53,112.461) -53.655,111.668 ; -53.876,111.478 ccw(c-54.53,112.461) -53.655,111.668 ; -53.876,111.478 ccw(c-54.53,112.461) -53.655,111.668 ; -53.876,111.478 ccw(c-54.53,112.461) -53.655,111.668 ; -53.876,111.478 ccw(c-54.53,112.461) -53.655,111.668 ; -53.876,111.478 ccw(c-54.53,112.461) -53.655,111.668 ; -53.876,111.478 ccw(c-54.53,112.461) -53.655,111.668 ; -53.876,111.478 ccw(c-54.53,112.461) -53.655,111.668 ; -53.876,111.478 ccw(c-54.53,112.461) -53.655,111.668 ; -53.876,111.478 ccw(c-54.53,112.461) -53.655,111.668 ; -53.876,111.478 ccw(c-54.53,112.461) -53.655,111.668 ; -53.876,111.478 ccw(c-54.53,112.461) -53.655,111.668 ; -53.876,111.478 ccw(c-54.53,112.461) -53.655,111.668 ; -53.876,111.478 ccw(c-54.53,112.461) -53.655,111.668 ; -53.876,111.478 ccw(c-54.53,112.461) -53.655,111.668 ; -53.876,111.478 ccw(c-54.53,112.461) -53.655,111.668 ; -53.876,111.478 ccw(c-54.53,112.461) -53.655,111.668 ; -53.876,111.478 ccw(c-54.53,112.461) -53.655,111.668 ; -53.876,111.478 ccw(c-54.53,112.461) -53.655,111.668 ; -53.876,111.478 ccw(c-54.53,112.461) -53.655,111.668 ; -53.876,111.478 ccw(c-54.53,112.461) -53.655,111.668 ; -53.876,111.478 ccw(c-54.53,112.461) -53.655,111.668 ; -53.876,111.478 ccw(c-54.53,112.461) -53.655,111.668 ; -53.876,111.478 ccw(c-54.53,112.461) -53.655,111.668 ; -53.876,111.478 ccw(c-54.53,112.461) -53.655,111.668 ; -53.876,111.478 ccw(c-54.53,112.461) -53.655,111.668 ; -53.876,111.478 ccw(c-54.53,112.461) -53.655,111.668 ; -53.876,111.478 ccw(c-54.53,112.461) -53.655,111.668 ; -53.876,111.478 ccw(c-54.53,112.461) -53.655,111.668 ; -53.876,111.478 ccw(c-54.53,112.461) -53.655,111.668 ; -53.876,111.478 ccw(c-54.53,112.461) -53.655,111.668 ; -53.876,111.478 ccw(c-54.53,112.461) -53.655,111.668 ; -53.876,111.478 ccw(c-54.53,112.461) -53.655,111.668
AN29: J7.32 J20.19 | length 35.1
  Top Layer w0.254: v1(-56.124,86.116) -56.114,86.126 J7.32@-56.114,90.653
  Bottom Layer w0.254: J20.19@-57.07,115.001 -55.889,113.82 -55.889,107.022 -55.86,106.993 -55.86,106.7 -57.15,105.41 -57.15,98.128 -55.86,96.838 -55.86,93.454 -55.889,93.425 -55.889,86.626 -56.124,86.391 v1(-56.124,86.116)
AN30: J7.34 J20.2 | length 64.7
  Top Layer w0.254: v1(-57.394,87.64) -57.384,87.65 J7.34@-57.384,90.653 ; J20.2@-34.21,112.461 -34.21,107.87 -25.4,99.06 v1(-24.638,99.06)
  Bottom Layer w0.254: v1(-57.394,87.64) -57.404,87.63 -57.404,83.969 -55.985,82.55 -50.8,82.55 -36.322,97.028 -26.67,97.028 v1(-24.638,99.06)
AN31: J7.36 J20.4 | length 61.5
  Top Layer w0.254: J7.36@-58.654,90.653 -58.537,90.536 -58.537,85.102 -57.255,83.82 v1(-54.61,83.82) ; J20.4@-36.75,112.461 -36.75,108.886 v1(-26.924,99.06)
  Bottom Layer w0.254: v1(-54.61,83.82) -51.816,83.82 -36.576,99.06 v1(-26.924,99.06)
AN32: J7.45 J20.6 | length 34.9
  Top Layer w0.254: J7.45@-65.004,94.723 -65.004,97.81 -57.912,104.902 -52.578,104.902 -51.562,105.918 -45.833,105.918 J20.6@-39.29,112.461
AN33: J7.47 J20.8 | length 33.6
  Top Layer w0.254: J7.47@-66.274,94.723 -66.274,97.81 -58.166,105.918 -53.34,105.918 -52.324,106.934 -47.357,106.934 J20.8@-41.83,112.461
AN34: J7.49 J20.10 | length 32.3
  Top Layer w0.254: J7.49@-67.544,94.723 -67.544,97.81 -58.42,106.934 -54.102,106.934 -53.086,107.95 -48.881,107.95 J20.10@-44.37,112.461
AN35: J7.51 J20.12 | length 31.1
  Top Layer w0.254: J7.51@-68.824,94.713 -68.824,97.8 -58.674,107.95 -54.61,107.95 -53.594,108.966 -50.405,108.966 J20.12@-46.91,112.461
AN36: J7.53 J20.14 | length 29.8
  Top Layer w0.254: J7.53@-70.084,94.723 -70.084,97.81 -58.928,108.966 -55.118,108.966 -54.102,109.982 -51.929,109.982 J20.14@-49.45,112.461
AN37: J7.55 J20.16 | length 28.5
  Top Layer w0.254: J7.55@-71.354,94.723 -71.354,97.81 -59.182,109.982 -55.626,109.982 -54.61,110.998 -53.453,110.998 J20.16@-51.99,112.461
AN38: J7.57 J20.18 | length 27.2
  Top Layer w0.254: J7.57@-72.624,94.723 -72.624,97.81 -59.436,110.998 -55.993,110.998 J20.18@-54.53,112.461
AN39: J7.59 J20.20 | length 26
  Top Layer w0.254: J7.59@-73.904,94.713 -73.904,97.8 -59.243,112.461 J20.20@-57.07,112.461
AN40: J7.46 J26.1 | length 31.7
  Top Layer w0.254: v1(-65.014,87.64) -64.994,87.66 J7.46@-64.994,90.663
  Bottom Layer w0.254: v1(-65.014,87.64) -64,88.654 -64,99.576 -63.246,100.33 -63.246,113.557 J26.1@-64.69,115.001
AN41: J7.48 J26.3 | length 38.1
  Top Layer w0.254: J7.48@-66.274,90.653 -66.274,84.024 v1(-66.25,84)
  Bottom Layer w0.254: J26.3@-67.23,115.001 -66.3,114.071 -66.25,114.021 -66.25,113.018 cw(c-67.23,112.461) -66.25,111.905 v1(-66.25,84)
AN42: J7.50 J26.5 | length 36.1
  Top Layer w0.254: J7.50@-67.544,90.653 -67.522,90.631 -67.522,85.272 v1(-67.5,85.25)
  Bottom Layer w0.254: J26.5@-69.77,115.001 -68.589,113.82 -68.589,107.959 -67.5,106.87 v1(-67.5,85.25)
AN43: J7.52 J26.7 | length 34.9
  Top Layer w0.254: v1(-68.814,86.126) J7.52@-68.814,90.653
  Bottom Layer w0.254: J26.7@-72.31,115.001 -70.951,113.642 -70.951,108.543 -68.814,106.406 v1(-68.814,86.126)
AN44: J7.54 J26.2 | length 30.1
  Top Layer w0.254: v1(-70.104,105.664) -64.69,111.078 J26.2@-64.69,112.461 ; v1(-70.094,87.64) -70.074,87.66 J7.54@-70.074,90.663
  Bottom Layer w0.254: v1(-70.104,105.664) -70.099,105.659 -70.099,87.645 v1(-70.094,87.64)
AN45: J7.56 J26.4 | length 32.6
  Top Layer w0.254: v1(-71.374,103.632) -71.374,108.317 J26.4@-67.23,112.461 ; v1(-71.364,86.116) -71.354,86.126 J7.56@-71.354,90.653
  Bottom Layer w0.254: v1(-71.374,103.632) -71.369,103.627 -71.369,86.121 v1(-71.364,86.116)
AN46: J7.58 J26.6 | length 29
  Top Layer w0.254: v1(-72.644,101.6) -72.644,109.404 -69.77,112.278 J26.6@-69.77,112.461 ; v1(-72.634,87.64) -72.624,87.65 J7.58@-72.624,90.653
  Bottom Layer w0.254: v1(-72.644,101.6) -72.639,101.595 -72.639,87.645 v1(-72.634,87.64)
AN47: J7.60 J26.8 | length 31.5
  Top Layer w0.254: v1(-73.894,86.126) J7.60@-73.894,90.653
  Bottom Layer w0.254: v1(-73.894,86.126) -73.894,110.877 J26.8@-72.31,112.461
GND: J1.10 J2.4 J3.14 J4.6 J5.01 J5.02 J5.03 J5.04 J6.01 J6.02 J6.03 J6.04 J6.19 J6.20 J6.49 J6.50 J6.76 J7.01 J7.02 J7.03 J7.04 J7.37 J7.38 J7.41 J7.43 J7.44 J7.61 J7.62 J8.01 J8.02 J8.03 J8.04 J10.6 J12.10 J16.14 J24.1 J24.2 J24.3 J24.4 J24.5 J24.6 J24.7 J24.8 J27.8 | length 88.3
  Top Layer w0.254: v1(-149.098,88.138) v1@-149.088,88.148 ; J6.76@-149.088,90.643 J6.76@-149.078,90.653 ; v1(-75.174,87.64) v1@-75.154,87.66 ; v1(-59.944,99.06) v1@-59.934,99.05 ; v1(-59.934,87.64) v1@-59.914,87.66 ; J7.37@-59.934,94.733 J7.37@-59.924,94.723 ; J7.02@-37.064,91.678 -37.064,90.667 J7.02@-36.821,90.424 ; v1@-34.881,92.793 v1(-34.798,92.71)
  Top Layer w0.5: v1@-149.088,88.148 J6.76@-149.088,90.643 ; v1@-132.568,88.115 J6.50@-132.568,90.653 ; J6.49@-132.568,94.723 v1@-132.568,97.262 ; v1@-113.518,87.65 J6.20@-113.518,90.653 ; J6.19@-113.518,94.723 v1@-113.518,97.726 ; J5.03@-103.368,9.211 v1@-103.368,13.02 ; J6.04@-103.358,90.653 -103.358,88.88 -102.362,87.884 v1(-99.568,87.884) ; J6.03@-103.358,94.723 v1@-103.358,97.262 ; v1@-103.348,2.583 J5.04@-103.348,5.121 ; J5.01@-102.098,9.211 v1@-102.098,11.75 ; J6.02@-102.088,90.653 -102.063,90.678 v1(-99.568,90.678) ; J6.01@-102.088,94.723 -102.069,94.742 v1(-100.076,94.742) ; v1@-102.078,1.313 J5.02@-102.078,5.121 ; J7.61@-75.164,94.723 v1@-75.164,97.726 ; v1@-75.154,87.66 J7.62@-75.154,90.663 ; J7.43@-63.744,94.713 -63.744,96.784 -63.129,97.399 v1(-62.992,97.536) -62.992,97.507 -62.464,96.979 J7.41@-62.464,94.723 ; v1(-63.734,86.126) J7.44@-63.734,90.653 ; J7.37@-59.934,94.733 v1@-59.934,99.05 ; v1@-59.914,87.66 J7.38@-59.914,90.663 ; J7.04@-38.334,90.653 -38.334,88.88 -37.846,88.392 v1(-34.798,88.392) ; J7.03@-38.334,94.723 -37.17,94.723 J7.01@-37.064,94.617 ; J7.02@-36.821,90.424 v1(-34.798,90.424) ; J7.01@-36.821,94.374 -35.7,94.374 -34.881,93.555 v1@-34.881,92.793 ; J8.03@-36.82,9.211 v1@-36.82,13.02 ; J8.04@-36.81,5.131 -36.81,3.536 v1(-35.56,2.286) ; J8.01@-35.55,9.211 v1@-35.55,11.75 ; J8.02@-35.54,5.131 -35.489,5.08 v1(-33.782,5.08)
  other v1: -157.48,-50.8 -153.67,-50.8 -149.86,-50.8 -146.05,-50.8 -142.24,-50.8 -157.48,-46.99 -153.67,-46.99 -149.86,-46.99 -146.05,-46.99 -88.75,-45 -157.48,-43.18 -153.67,-43.18 -149.86,-43.18 -157.48,-39.37 -153.67,-39.37 -142.24,-39.37 -88.75,-37.5 -157.48,-35.56 -146.05,-35.56 -142.24,-35.56 -149.86,-31.75 -146.05,-31.75 -142.24,-31.75 -88.75,-31.25 -152.4,-26.162 -137.414,-26.162 -6.35,-21.59 -8.89,-21.082 -16.51,-20.32 -13.97,-20.32 -11.43,-20.32 -128.778,-7.62 -124.968,-7.62 -108.458,-7.62 -138.21,-7.501 -112.25,-7.5 -128.778,-3.81 -124.968,-3.81 -112.268,-3.81 -108.458,-3.81 -142.02,-3.691 -138.21,-3.691 -128.778,0 -124.968,0 -112.268,0 -108.458,0 -142.02,0.119 -138.21,0.119 -25.4,1.27 -102.068,1.303 -103.338,2.573 -29.21,5.08 -25.4,5.08 -29.21,8.89 -102.108,11.76 -35.56,11.76 -113.75,12.5 -110,12.5 -103.378,13.03 -36.83,13.03 -140.97,13.97 -137.16,13.97 -128.778,13.97 -124.968,13.97 -113.75,16.25 -110,16.25 -106.25,16.25 -140.97,17.78 -137.16,17.78 -128.778,17.78 -124.968,17.78 -54.61,20.32 -50.8,20.32 -46.99,20.32 -43.18,20.32 -39.37,20.32 -140.97,21.336 -137.16,21.336 -54.61,23.876 -50.8,24.13 -46.99,24.13 -43.18,24.13 -140.97,25.4 -137.16,25.4 -54.61,27.94 -50.8,27.94 -46.99,27.94 -140.97,29.21 -137.16,29.21 -140.97,33.02 -55,35 -50,35 -45,35 -123.75,38.75 -126.25,41.25 -123.75,42.5 -128.75,43.5 -126.25,45 -128.75,47.5 -142.5,50 -121.25,50 -123.75,52.5 -8.89,53.34 -142.5,55 -12.7,57.15 -8.89,57.15 -16.51,60.96 -12.7,60.96 -8.89,60.96 -12.7,64.516 -8.89,64.516 -20.32,64.77 -16.51,64.77 -24.13,68.58 -20.32,68.58 -16.51,68.58 -12.7,68.58 -8.89,68.58 -24.13,72.39 -20.32,72.39 -16.51,72.39 -12.7,72.39 -8.89,72.39 -27.94,72.644 -31.75,76.2 -27.94,76.2 -24.13,76.2 -20.32,76.2 -16.51,76.2 -12.7,76.2 -8.89,76.2 -143.774,79.492 -27.94,80.01 -24.13,80.01 -20.32,80.01 -16.51,80.01 -12.7,80.01 -8.89,80.01 -57.5,80.75 -51.25,80.75 -12.7,83.82 -8.89,83.82 -86.36,85.852 -113.528,87.64 -132.558,88.105 -132.578,97.272 -103.368,97.272 -113.508,97.736 -75.144,97.747 -97.282,98.552 -99.06,100.33 -100.838,102.108 -86.25,102.5 -82.5,102.5 -77.5,102.5 -55.885,102.621 -77.5,106.25 -83.82,111.76 -80.01,111.76 -76.2,111.76 -95.25,115.57 -91.44,115.57 -87.884,115.57 -83.82,115.57 -80.01,115.57 -76.2,115.57 -105,123.75 -98.75,123.75 -92.5,123.75 -86.25,123.75 -80,123.75
P00.0: J3.1 J6.45 | length 229.5
  Top Layer w0.254: J6.45@-130.038,94.733 v1@-130.038,98.796
  Bottom Layer w0.254: v1(-130.048,98.806) -130.048,103.886 -124.714,109.22 -95.25,109.22 -89.408,103.378 -89.408,82.804 -82.042,75.438 -44.958,75.438 -3.73,34.21 J3.1@-3.73,-14.539
P00.1: J3.3 J6.47 | length 223.8
  Top Layer w0.254: J6.47@-131.298,94.723 -131.298,99.588 -129.032,101.854 v1(-127.508,101.854)
  Bottom Layer w0.254: v1(-127.508,101.854) -121.412,107.95 -96.52,107.95 -90.932,102.362 -90.932,82.042 -82.804,73.914 -47.244,73.914 -6.27,32.94 J3.3@-6.27,-14.539
P00.2: J3.5 J6.48 | length 203.1
  Top Layer w0.254: v1(-131.318,73.66) v1(-90.424,73.66) ; v1@-131.288,86.136 J6.48@-131.288,90.663
  Bottom Layer w0.254: v1(-131.318,73.66) -131.308,73.67 -131.308,86.116 v1(-131.298,86.126) ; v1(-90.424,73.66) -89.154,72.39 -49.53,72.39 -8.81,31.67 J3.5@-8.81,-14.539
P00.3: J3.7 J6.46 | length 199.5
  Top Layer w0.254: v1(-130.048,72.136) -129.921,72.009 -90.551,72.009 v1(-90.424,71.882) ; v1(-130.028,87.65) -130.008,87.67 J6.46@-130.008,90.673
  Bottom Layer w0.254: v1(-130.048,72.136) -130.048,79.98 -130.028,80 v1(-130.028,87.65) ; v1(-90.424,71.882) -89.408,70.866 -51.816,70.866 -11.35,30.4 J3.7@-11.35,-14.539
P00.4: J3.9 J6.40 | length 193.7
  Top Layer w0.254: v1@-126.238,70.104 v1(-90.424,70.104) ; v1(-126.218,86.126) -126.208,86.136 J6.40@-126.208,90.663
  Bottom Layer w0.254: v1(-126.248,70.094) -126.233,70.109 -126.233,86.111 v1(-126.218,86.126) ; v1(-90.424,70.104) -89.662,69.342 -54.102,69.342 -13.716,28.956 -13.716,-14.365 J3.9@-13.89,-14.539
P00.5: J3.11 J6.68 | length 216.7
  Top Layer w0.254: v1(-144.018,60.96) -145.034,61.976 -145.034,82.55 -143.988,83.596 -143.988,86.136 J6.68@-143.988,90.663 ; v1(-130.81,60.96) -125.222,66.548 v1(-90.424,66.548)
  Bottom Layer w0.254: v1(-144.018,60.96) v1(-130.81,60.96) ; v1(-90.424,66.548) -90.149,66.548 -89.895,66.294 -58.674,66.294 -16.43,24.05 J3.11@-16.43,-14.539
P00.6: J3.13 J7.72 | length 141.8
  Top Layer w0.254: v1(-81.534,63.246) -81.524,63.256 -81.524,90.643 J7.72@-81.514,90.653
  Bottom Layer w0.254: v1(-81.534,63.246) -63.246,63.246 -18.97,18.97 J3.13@-18.97,-14.539
P00.7: J3.2 J7.74 | length 172.4
  Top Layer w0.254: J7.74@-82.794,90.643 J7.74@-82.789,90.648 ; v1@-82.789,87.645 J7.74@-82.789,90.648 ; J7.74@-82.784,90.653 J7.74@-82.789,90.648 ; v1(-3.81,-20.32) -3.77,-20.28 -3.77,-17.119 J3.2@-3.73,-17.079
  Bottom Layer w0.254: v1(-82.809,87.625) -82.809,84.079 -77.216,78.486 -40.386,78.486 -0.254,38.354 -0.254,-18.288 -2.286,-20.32 v1(-3.81,-20.32)
P00.8: J3.4 J7.76 | length 170.1
  Top Layer w0.254: v1(-84.074,83.058) -84.064,83.068 -84.064,90.643 J7.76@-84.054,90.653 ; v1(-6.35,-19.05) -6.31,-19.01 -6.31,-17.119 J3.4@-6.27,-17.079
  Bottom Layer w0.254: v1(-84.074,83.058) -77.978,76.962 -42.672,76.962 -2.032,36.322 -2.032,-18.034 -3.048,-19.05 v1(-6.35,-19.05)
P00.9: J3.6 J8.05 | length 67.7
  Top Layer w0.254: -38.1,11.76 -38.1,13.97 -36.576,15.494 v1(-32.766,15.494) ; J8.05@-38.09,9.211 -38.09,11.75
  Bottom Layer w0.254: v1(-32.766,15.494) -21.844,4.572 -21.844,-19.558 -19.558,-21.844 -11.176,-21.844 -8.81,-19.478 J3.6@-8.81,-17.079
P00.10: J3.8 J8.07 | length 66
  Top Layer w0.254: J8.07@-39.36,9.211 -39.36,14.488 -36.576,17.272 v1(-34.29,17.272)
  Bottom Layer w0.254: v1(-34.29,17.272) -31.242,17.272 -20.574,6.604 -20.574,-18.542 -19.866,-19.25 -12.138,-19.25 -11.35,-18.462 J3.8@-11.35,-17.079
P00.11: J3.10 J6.66 | length 218.2
  Top Layer w0.254: v1(-142.748,63.5) -142.748,90.633 J6.66@-142.728,90.653 ; v1(-130.81,63.5) -125.984,68.326 v1(-90.424,68.326)
  Bottom Layer w0.254: v1(-142.748,63.5) v1(-130.81,63.5) ; v1(-90.424,68.326) -90.379,68.326 -89.871,67.818 -56.388,67.818 -15.251,26.681 -15.251,-15.229 -14.872,-15.608 -14.148,-16.332 -14.148,-16.821 J3.10@-13.89,-17.079
P00.12: J3.12 J6.64 | length 215.7
  Top Layer w0.254: v1(-141.478,58.42) -141.458,58.44 J6.64@-141.458,90.653 ; v1(-130.81,58.42) -124.46,64.77 v1(-90.424,64.77)
  Bottom Layer w0.254: v1(-141.478,58.42) v1(-130.81,58.42) ; v1(-90.424,64.77) -60.96,64.77 -17.557,21.367 -17.557,-15.952 J3.12@-16.43,-17.079
P01.3: J8.27 J10.1 | length 73.5
  Top Layer w0.254: J8.27@-52.06,9.211 v1@-52.06,13.02 ; v1(-45.466,-20.066) -26.67,-20.066 -24.638,-18.034 -24.638,-15.24 -25.339,-14.539 J10.1@-26.59,-14.539
  Bottom Layer w0.254: v1(-52.07,13.03) -52.07,-9.398 -55.372,-12.7 -55.372,-17.78 -53.086,-20.066 v1(-45.466,-20.066)
P01.4: J8.29 J10.3 | length 83.1
  Top Layer w0.254: J8.29@-53.33,9.211 v1@-53.33,11.75 ; v1(-45.466,-22.352) -27.432,-22.352 -23.622,-18.542 -23.622,-13.97 -25.146,-12.446 -28.194,-12.446 -29.13,-13.382 J10.3@-29.13,-14.539
  Bottom Layer w0.254: v1(-53.34,11.76) -53.34,-9.144 -56.642,-12.446 -56.642,-19.304 -53.594,-22.352 v1(-45.466,-22.352)
P01.5: J8.32 J10.5 | length 33.3
  Top Layer w0.254: J8.32@-54.59,5.131 -54.59,1.25 -42.418,-10.922 -35.287,-10.922 J10.5@-31.67,-14.539
P01.6: J8.34 J10.2 | length 43.1
  Top Layer w0.254: J8.34@-55.86,5.131 -55.86,0.742 -42.672,-12.446 -38.1,-12.446 -35.306,-15.24 -35.306,-16.256 -32.766,-18.796 -28.307,-18.796 J10.2@-26.59,-17.079
P01.7: J8.76 J10.4 | length 113.5
  Top Layer w0.254: v1@-82.53,2.669 J8.76@-82.53,5.131 ; v1(-82.52,2.659) -82.52,1.554 -82.804,1.27 -85.344,1.27 -87.122,3.048 -87.122,17.272 -84.074,20.32 -79.502,20.32 -76.962,17.78 v1(-55.88,17.78)
  Bottom Layer w0.254: v1(-55.88,17.78) -37.846,17.78 -31.75,11.684 -31.75,-11.938 -30.543,-13.145 -30.543,-15.939 -29.403,-17.079 J10.4@-29.13,-17.079
P02.0: J8.09 J18.1 | length 29.4
  Top Layer w0.254: J8.09@-40.63,9.211 v1@-40.63,11.75
  Bottom Layer w0.254: v1(-40.64,11.76) -40.64,-13.189 J18.1@-39.29,-14.539
P02.1: J8.11 J18.3 | length 31.4
  Top Layer w0.254: J8.11@-41.9,9.211 v1@-41.9,13.02
  Bottom Layer w0.254: v1(-41.91,13.03) -41.87,12.99 -41.87,-14.499 J18.3@-41.83,-14.539
P02.2: J8.13 J18.5 | length 29.3
  Top Layer w0.254: J8.13@-43.17,9.211 v1@-43.17,11.75
  Bottom Layer w0.254: J18.5@-44.37,-14.539 -43.18,-13.349 v1(-43.18,11.76)
P02.3: J8.15 J18.7 | length 32.4
  Top Layer w0.254: J8.15@-44.44,9.211 v1@-44.44,13.02
  Bottom Layer w0.254: J18.7@-46.91,-14.539 -44.45,-12.079 v1(-44.45,13.03)
P02.4: J8.17 J18.9 | length 30.4
  Top Layer w0.254: J8.17@-45.71,9.211 v1@-45.71,11.75
  Bottom Layer w0.254: J18.9@-49.45,-14.539 -45.72,-10.809 v1(-45.72,11.76)
P02.5: J8.19 J18.11 | length 33.4
  Top Layer w0.254: J8.19@-46.98,9.211 v1@-46.98,13.02
  Bottom Layer w0.254: J18.11@-51.99,-14.539 -46.99,-9.539 v1(-46.99,13.03)
P02.6: J7.71 J18.2 | length 174.4
  Top Layer w0.254: J7.71@-81.514,94.723 v1@-81.514,99.25 ; v1(-73.914,83.058) -73.914,61.214 v1(-72.39,59.69) ; v1(-63.5,-9.652) -66.04,-12.192 -66.04,-19.05 v1(-54.61,-30.48)
  Bottom Layer w0.254: v1(-81.504,99.26) -76.454,94.211 -76.454,85.598 v1(-73.914,83.058) ; v1(-72.39,59.69) -71.12,58.42 -71.12,45.72 -61.214,35.814 -61.214,-6.604 -63.5,-8.89 v1(-63.5,-9.652) ; v1(-54.61,-30.48) -45.72,-30.48 -39.29,-24.05 J18.2@-39.29,-17.079
P02.7: J7.73 J18.4 | length 167.7
  Top Layer w0.254: J7.73@-82.784,94.723 v1@-82.784,97.726 ; v1(-69.85,59.69) v1(-69.85,81.788) ; v1(-61.468,-9.652) -63.5,-11.684 -63.5,-19.05 v1(-54.61,-27.94)
  Bottom Layer w0.254: v1(-82.764,97.747) -78.994,93.977 -78.994,85.344 -75.438,81.788 v1(-69.85,81.788) ; v1(-69.85,59.69) -60.198,50.038 -60.198,-6.858 -61.468,-8.128 v1(-61.468,-9.652) ; v1(-54.61,-27.94) -45.72,-27.94 -41.83,-24.05 J18.4@-41.83,-17.079
P02.8: J7.75 J18.6 | length 166.7
  Top Layer w0.254: J7.75@-84.054,94.723 v1@-84.054,99.25 ; v1(-67.31,59.69) v1(-67.31,80.264) ; v1(-59.69,-8.89) -59.69,-11.176 -60.96,-12.446 -60.96,-19.304 v1(-54.61,-25.654)
  Bottom Layer w0.254: v1(-84.044,99.26) -84.044,95.294 -81.793,93.043 -81.793,85.095 -76.962,80.264 v1(-67.31,80.264) ; v1(-67.31,59.69) -59.182,51.562 -59.182,-6.604 -59.69,-7.112 v1(-59.69,-8.89) ; v1(-54.61,-25.654) -45.894,-25.654 -44.37,-24.13 J18.6@-44.37,-17.079
P02.9: J8.21 J18.8 | length 31.9
  Top Layer w0.254: v1(-48.26,-9.144) -48.26,-15.729 J18.8@-46.91,-17.079 ; J8.21@-48.25,9.211 v1@-48.25,11.75
  Bottom Layer w0.254: v1(-48.26,-9.144) v1(-48.26,11.76)
P02.10: J8.23 J18.10 | length 35
  Top Layer w0.254: v1(-50.8,-11.43) -50.8,-15.729 J18.10@-49.45,-17.079 ; J8.23@-49.52,9.211 v1@-49.52,13.02
  Bottom Layer w0.254: v1(-50.8,-11.43) -49.53,-10.16 v1(-49.53,13.03)
P02.11: J8.25 J18.12 | length 33.6
  Top Layer w0.254: J8.25@-50.79,9.211 v1@-50.79,11.75
  Bottom Layer w0.254: J18.12@-51.99,-17.079 -54.102,-14.967 -54.102,-12.954 -50.8,-9.652 v1(-50.8,11.76)
P10.0: J1.1 J8.31 | length 33.4
  Top Layer w0.254: J8.31@-54.6,9.211 v1@-54.6,13.02
  Bottom Layer w0.254: J1.1@-59.61,-14.539 -59.597,-14.526 -59.597,-13.623 -54.61,-8.636 v1(-54.61,13.03)
P10.1: J1.3 J8.33 | length 31.4
  Top Layer w0.254: J8.33@-55.87,9.211 v1@-55.87,11.75
  Bottom Layer w0.254: J1.3@-62.137,-14.526 -55.88,-8.269 v1(-55.88,11.76)
P10.2: J1.5 J6.27 | length 166
  Top Layer w0.254: J6.27@-118.598,94.723 -118.598,98.572 -113.792,103.378 -99.568,103.378 -90.17,93.98 -90.17,81.28 -87.63,78.74 v1(-87.63,60.198)
  Bottom Layer w0.254: v1(-87.63,60.198) -76.2,60.198 -73.66,57.658 -73.66,44.45 -67.31,38.1 -67.31,13.462 -62.23,8.382 -62.23,-6.35 -64.69,-8.81 J1.5@-64.69,-14.539
P10.3: J1.7 J6.74 | length 174.2
  Top Layer w0.254: J6.74@-147.808,90.653 -147.808,87.65 -147.818,87.64 -147.818,48.758 -123.952,24.892 v1(-68.834,24.892)
  Bottom Layer w0.254: v1(-68.834,24.892) -69.85,23.876 -69.85,13.208 -64.262,7.62 -64.262,-4.826 -67.23,-7.794 J1.7@-67.23,-14.539
P10.4: J1.9 J6.25 | length 162.4
  Top Layer w0.254: J6.25@-117.338,94.733 v1@-117.338,97.526 ; v1(-114.808,35.052) -114.753,35.107 -72.487,35.107 v1(-72.432,35.161)
  Bottom Layer w0.254: v1(-117.348,97.536) -114.808,94.996 v1(-114.808,35.052) ; v1(-72.432,35.161) -72.39,35.119 -72.39,12.7 -66.294,6.604 -66.294,-3.302 -69.77,-6.778 J1.9@-69.77,-14.539
P10.5: J1.2 J6.23 | length 168.5
  Top Layer w0.254: J6.23@-116.058,94.723 -116.058,98.826 -112.776,102.108 -104.902,102.108 -91.44,88.646 -91.44,80.01 -88.9,77.47 v1(-88.9,61.976) ; J1.2@-59.61,-17.079 -58.25,-15.719 v1(-58.25,-7.5)
  Bottom Layer w0.254: v1(-88.9,61.976) -67.056,61.976 -58.25,53.17 v1(-58.25,-7.5)
P10.6: J1.4 J8.35 | length 40.9
  Top Layer w0.254: J8.35@-57.14,9.211 -57.14,13.218 v1(-55.88,14.478)
  Bottom Layer w0.254: J1.4@-62.15,-17.079 -63.277,-15.952 -63.277,-14.001 -57.15,-7.874 -57.15,13.208 v1(-55.88,14.478)
P10.7: J1.6 J6.73 | length 197.6
  Top Layer w0.254: J6.73@-147.808,94.723 -147.808,98.532 -149.098,99.822 -151.384,99.822 -152.908,98.298 -152.908,50.038 -125.73,22.86 v1(-68.58,22.86)
  Bottom Layer w0.254: v1(-68.58,22.86) -68.58,13.208 -63.246,7.874 -63.246,-5.588 -65.817,-8.159 -65.817,-15.952 J1.6@-64.69,-17.079
P10.8: J1.8 J6.72 | length 176.3
  Top Layer w0.254: J6.72@-146.538,90.653 -146.538,51.288 -122.174,26.924 v1(-68.834,26.924)
  Bottom Layer w0.254: v1(-68.834,26.924) -71.12,24.638 -71.12,12.954 -65.278,7.112 -65.278,-4.064 -68.357,-7.143 -68.357,-15.952 J1.8@-67.23,-17.079
P11.13: J2.1 J8.67 | length 31.2
  Top Layer w0.254: v1(-80.518,-2.032) -80.518,-9.652 -77.39,-12.78 J2.1@-77.39,-14.539 ; J8.67@-77.45,9.201 v1@-77.45,11.664
  Bottom Layer w0.254: v1(-80.518,-2.032) -78.74,-0.254 -78.72,-0.234 -77.978,0.508 -77.978,11.176 v1@-77.47,11.684
  other v1: -77.44,11.674
P11.14: J2.3 J8.06 | length 96.3
  Top Layer w0.254: J2.3@-79.93,-14.539 -79.93,-14.558 -78.613,-15.875 -78.613,-26.797 -68.072,-37.338 v1(-62.992,-37.338) ; J8.06@-38.07,5.121 -38.07,3.011 -37.592,2.533 v1(-37.592,2.286)
  Bottom Layer w0.254: v1(-62.992,-37.338) -55.118,-37.338 -50.546,-32.766 -42.926,-32.766 -36.068,-25.908 -36.068,-12.192 -37.592,-10.668 v1(-37.592,2.286)
P11.15: J2.2 J8.08 | length 86.4
  Top Layer w0.254: J2.2@-77.39,-17.079 -77.39,-24.21 -66.802,-34.798 v1(-65.278,-34.798) ; v1(-39.37,2.286) -39.36,2.296 -39.36,5.101 J8.08@-39.34,5.121
  Bottom Layer w0.254: v1(-65.278,-34.798) -55.118,-34.798 -52.07,-31.75 -44.45,-31.75 -37.338,-24.638 -37.338,-13.462 -39.37,-11.43 v1(-39.37,2.286)
P12.0: J8.37 J22.1 | length 68.9
  Top Layer w0.254: v1(-74.93,15.24) -60.706,15.24 -58.41,12.944 -58.41,9.211 J8.37@-58.4,9.201
  Bottom Layer w0.254: J22.1@-87.55,-14.539 -90.678,-11.411 -90.678,13.462 -86.614,17.526 -78.994,17.526 -76.708,15.24 v1(-74.93,15.24)
P12.1: J8.39 J22.2 | length 72.8
  Top Layer w0.254: v1(-81.28,18.796) -75.184,12.7 -60.706,12.7 -59.67,11.664 J8.39@-59.67,9.201
  Bottom Layer w0.254: J22.2@-87.55,-17.079 -91.694,-12.935 -91.694,14.986 -87.884,18.796 v1(-81.28,18.796)
P13.0: J6.31 J25.1 | length 149.7
  Top Layer w0.254: v1(-121.158,97.536) -121.148,97.526 -121.148,94.733 J6.31@-121.138,94.723
  Bottom Layer w0.254: v1(-121.158,97.536) -121.158,101.854 -118.872,104.14 -100.33,104.14 -95.17,98.98 J25.1@-95.17,-14.539
P13.1: J6.29 J25.3 | length 139.7
  Top Layer w0.254: v1(-119.888,99.314) -119.878,99.304 -119.878,94.733 J6.29@-119.868,94.723
  Bottom Layer w0.254: v1(-119.888,99.314) -116.586,99.314 -114.554,101.346 -104.14,101.346 -97.71,94.916 J25.3@-97.71,-14.539
P13.2: J6.35 J25.2 | length 158.1
  Top Layer w0.254: v1(-123.698,97.536) -123.688,97.526 -123.688,94.733 J6.35@-123.678,94.723
  Bottom Layer w0.254: v1(-123.698,97.536) -123.698,101.092 -119.38,105.41 -99.06,105.41 -93.726,100.076 -93.726,-15.635 J25.2@-95.17,-17.079